# Allegro board belt-box-001-1003.brd
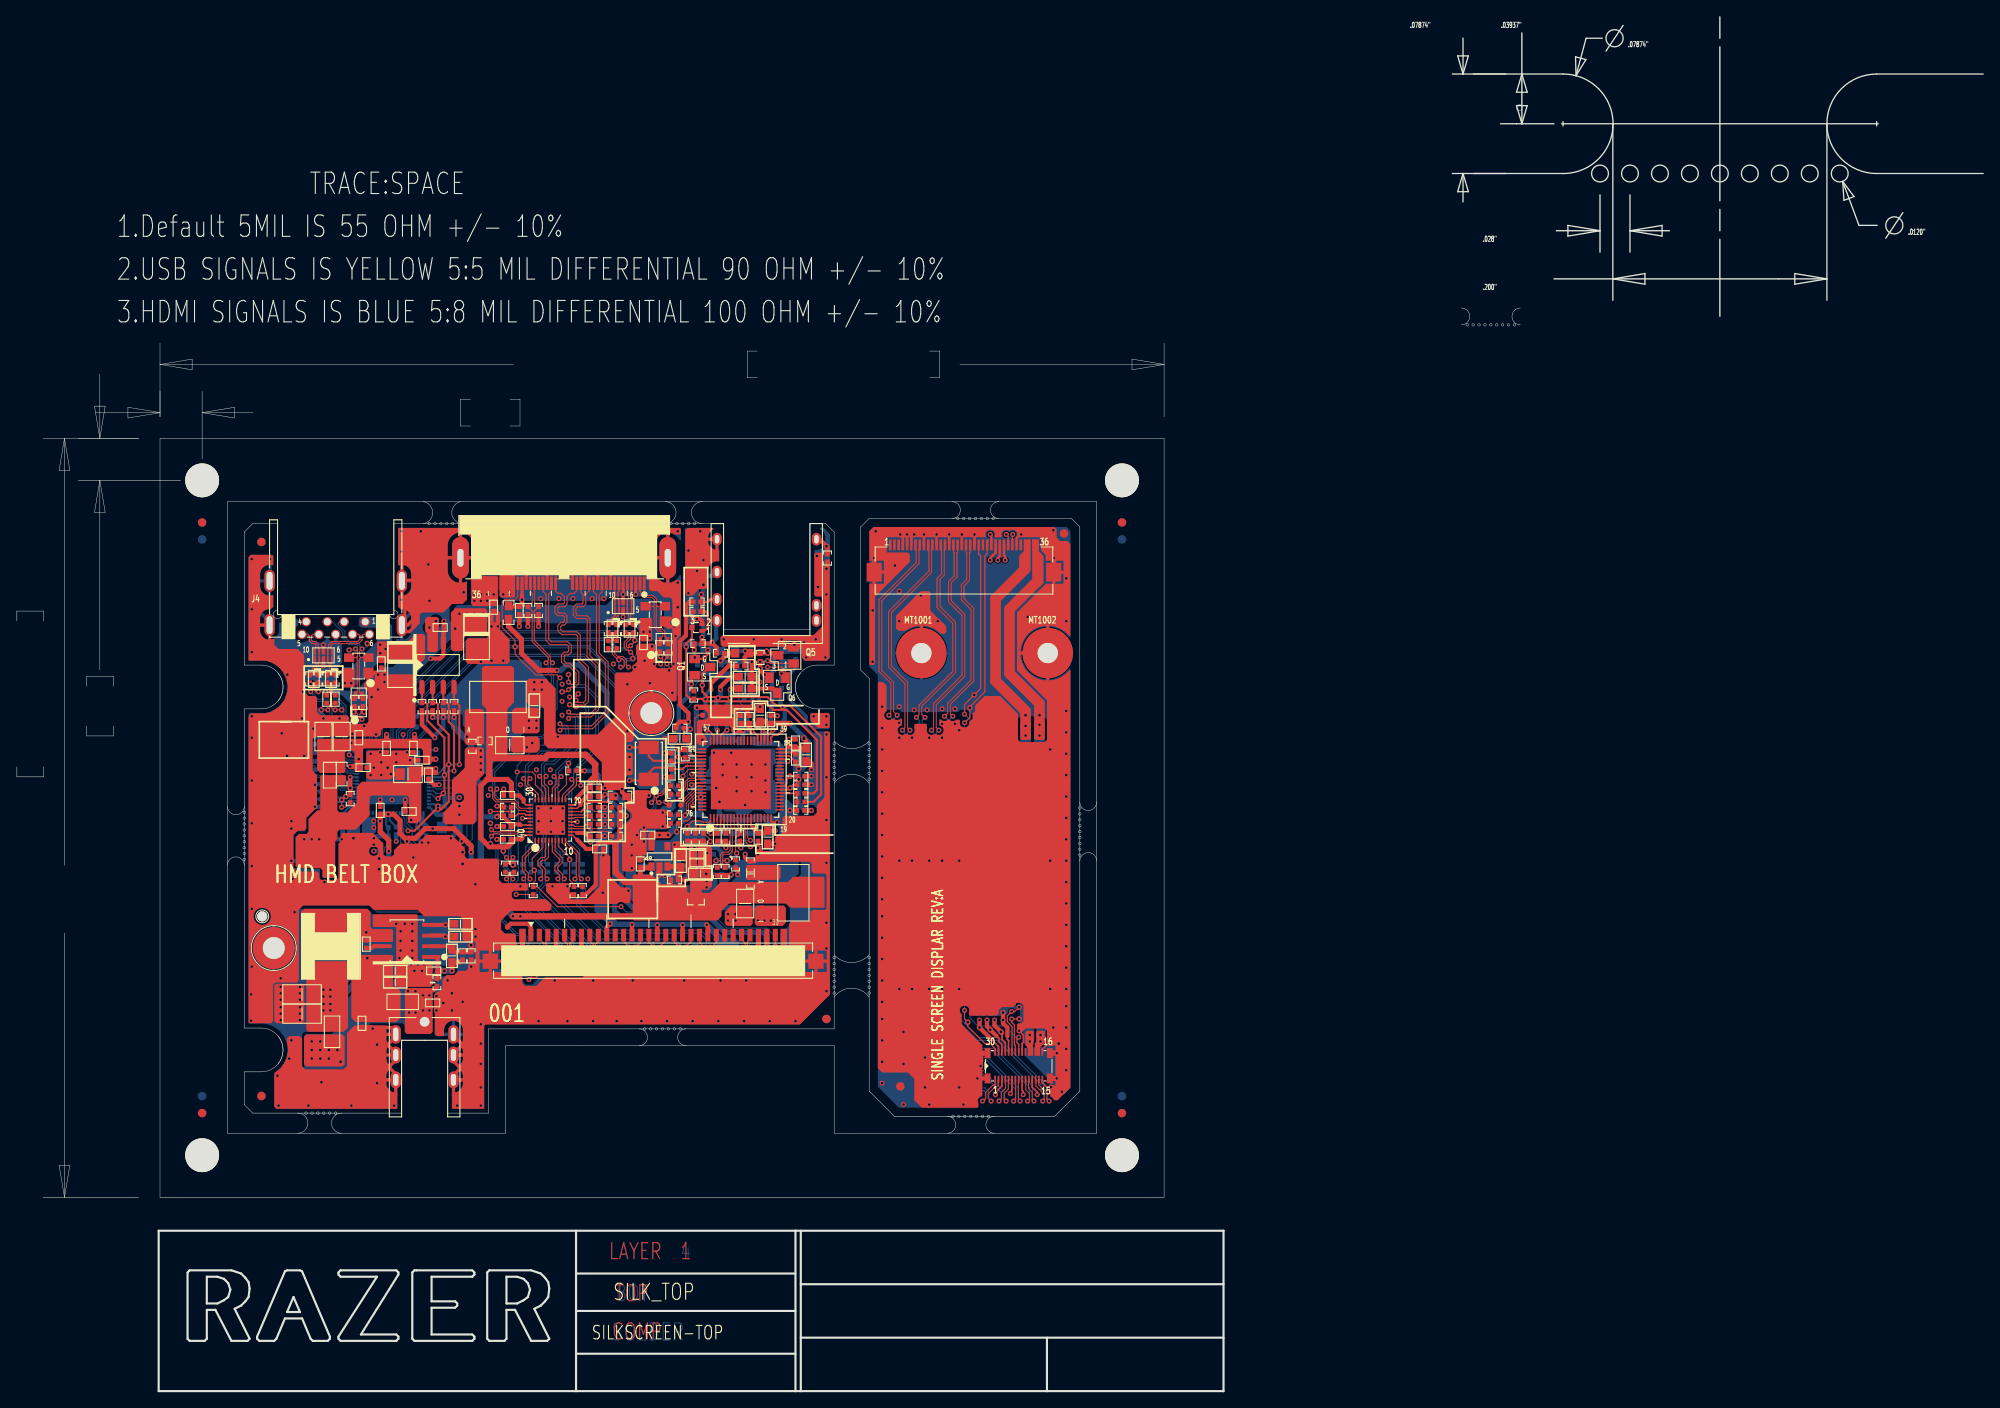
[diagram p0: board, top side]
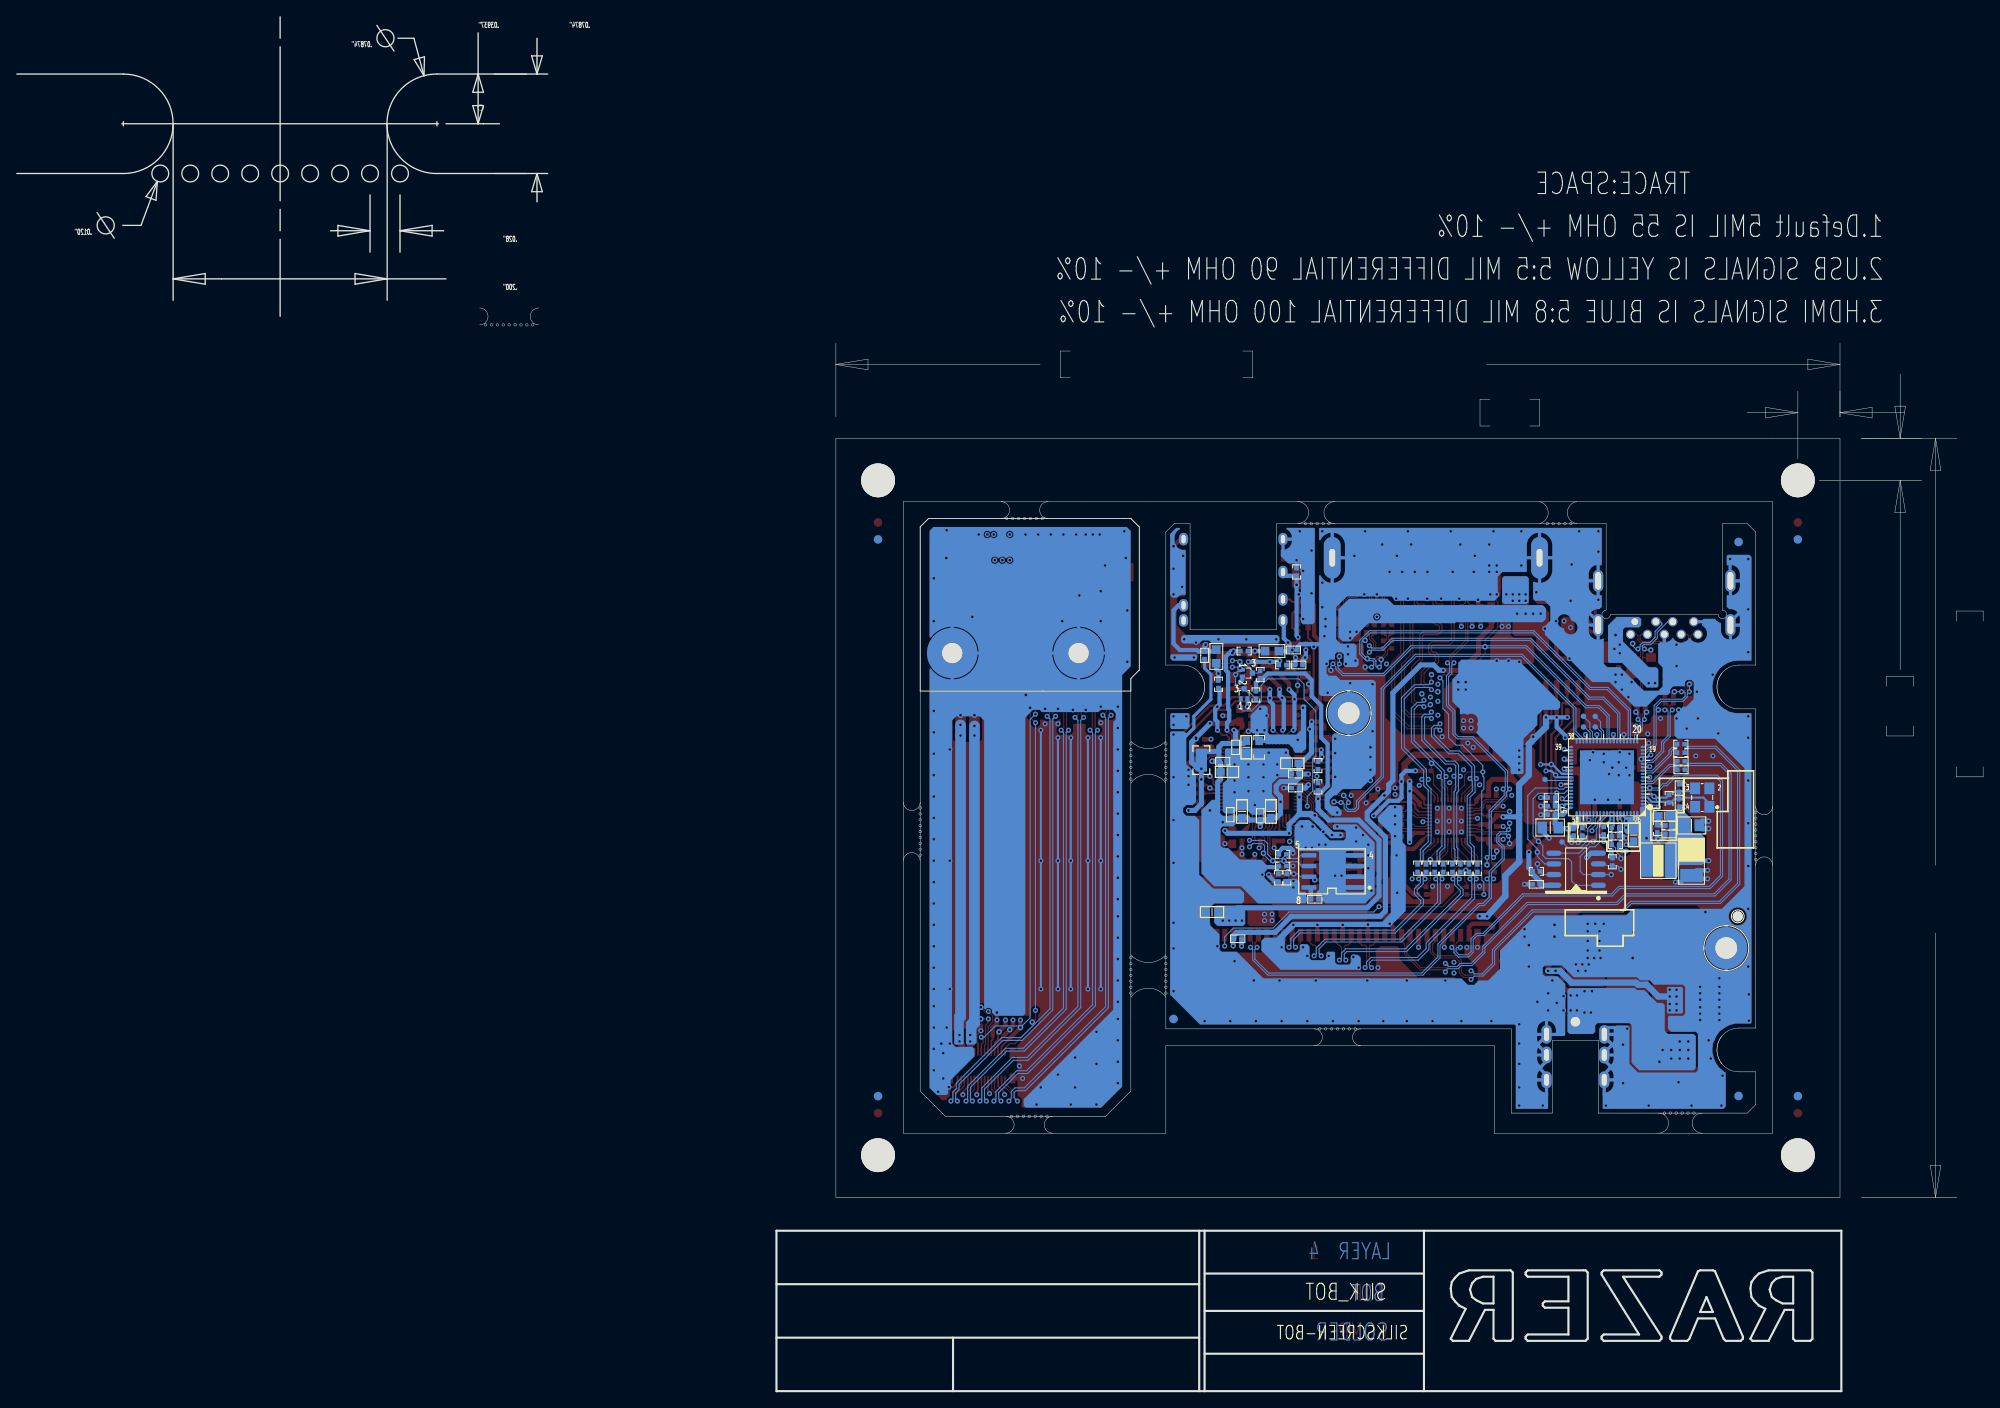
[diagram p1: board, bottom side, seen from below]

Outline 233.33 x 163.2 mm; copper layers: TOP, IN1, IN2, BOTTOM. Coordinates in mm from the lower left corner of the outline.

## Design rules (mm)
net group DIFFPAIR0: nets HMD_CON_DATA2+ HMD_CON_DATA2-
net group DIFFPAIR1: nets HMD_CON_DATA1+ HMD_CON_DATA1-
net group DIFFPAIR2: nets HMD_CON_DATA0+ HMD_CON_DATA0-
net group DIFFPAIR3: nets HMD_CON_CLK+ HMD_CON_CLK-
net group DIFFPAIR4: nets HDMI_CON_CLK+ HDMI_CON_CLK-
net group DIFFPAIR5: nets HDMI_CON_DATA0+ HDMI_CON_DATA0-
net group DIFFPAIR6: nets HDMI_CON_DATA1+ HDMI_CON_DATA1-
net group DIFFPAIR7: nets HDMI_CON_DATA2+ HDMI_CON_DATA2-
net group DIFFPAIR8: nets LCD1_DATAN3_T LCD1_DATAP3_T
net group DIFFPAIR9: nets LCD1_DATAN0_T LCD1_DATAP0_T
net group DIFFPAIR10: nets LCD1_CLKN_T LCD1_CLKP_T
net group DIFFPAIR11: nets LCD1_DATAN1_T LCD1_DATAP1_T
net group DIFFPAIR12: nets LCD1_DATAN2_T LCD1_DATAP2_T
net group DIFFPAIR13: nets HUB_RX1_CON_N HUB_RX1_CON_P
net group DIFFPAIR14: nets HUB_RXN1 HUB_RXP1
net group DIFFPAIR15: nets HUB_TX1_CON_N HUB_TX1_CON_P
net group DIFFPAIR16: nets USB3_TX1_C_N USB3_TX1_C_P
net group DIFFPAIR17: nets HUB_TXN1 HUB_TXP1
net group DIFFPAIR18: nets USB1+ USB1-
net group DIFFPAIR19: nets HUB_D+1 HUB_D-1
net group DIFFPAIR20: nets USB3.0_RXN_R USB3.0_RXP_R
net group DIFFPAIR21: nets USB3.0_TXN_R USB3.0_TXP_R
net group DIFFPAIR22: nets USB3.0_RXN USB3.0_RXP
net group DIFFPAIR23: nets USB3.0_TXN USB3.0_TXP
net group DIFFPAIR24: nets USB2.0_D+ USB2.0_D-
net group DIFFPAIR25: nets HUB_TX2_CON_N HUB_TX2_CON_P
net group DIFFPAIR26: nets USB3_TX2_C_N USB3_TX2_C_P
net group DIFFPAIR27: nets HUB_TXN2 HUB_TXP2
net group DIFFPAIR28: nets HUB_RX2_CON_N HUB_RX2_CON_P
net group DIFFPAIR29: nets HUB_RXN2 HUB_RXP2
net group DIFFPAIR30: nets USB2+ USB2-
net group DIFFPAIR31: nets HUB_D+2 HUB_D-2
net group DIFFPAIR32: nets USBP1N_R USBP1P_R
net group DIFFPAIR33: nets HUB_D+3 HUB_D-3

## Placement (name value [footprint] x y rotation side)
C1  0.1UF  [C0402]  58.23 65.53 0 top
C2  0.1U/16V_4  [C0402]  58.23 67.06 0 top
C3  0.1UF  [C0402]  58.23 70.74 0 top
C4  0.1UF  [C0402]  88.46 53.72 180 bottom
C5  0.1UF  [C0402]  59.63 92.71 270 top
C6  0.1UF  [C0402]  68.52 71.63 0 top
C7  0.1U/16V_4  [C0402]  69.15 64.39 0 top
C8  0.1UF  [C0402]  68.52 70.61 0 top
C9  0.1UF  [C0402]  68.52 65.91 0 top
C10  10uF_X5R_6.3V  [C0805]  86.42 57.91 90 top
C11  1uF_X5R_6.3V  [C0603]  91.5 56.9 180 bottom
C12  10uF_X5R_6.3V  [C0805]  58.48 76.71 180 top
C13  1uF_X5R_6.3V  [C0603]  61.4 81.41 270 top
C14  6TPE220MAZB  [TANB]  54.55 89.41 270 top
C15  470pF_X7R_50V  [C0402]  74.36 88.9 270 top
C16  0.1uF_X5R_10V  [C0402]  71.18 88.65 90 top
C17  0.1uF_X5R_10V  [C0402]  70.17 88.65 90 top
C18  0.1uF_X5R_10V  [C0402]  35.85 74.8 180 bottom
C19  0.1uF_X5R_10V  [C0402]  35.85 73.79 180 bottom
C20  0.1UF  [C0402]  46.55 68.83 180 top
C21  0.1UF  [C0402]  48.83 73.15 270 top
C22  0.1UF  [C0402]  48.07 74.93 180 top
C23  0.1UF  [C0402]  41.08 74.04 0 top
C24  0.1UF  [C0402]  47.05 76.33 270 top
C25  0.1UF  [C0402]  43.88 76.33 270 top
C26  0.1UF  [C0402]  40.58 77.6 90 top
C27  4.7UF  [C0603]  41.47 66.04 270 bottom
C28  10uF_X5R_6.3V  [C0805]  51.37 66.93 180 bottom
C29  0.1UF  [C0402]  43.12 68.96 90 top
C30  0.1UF  [C0402]  48.58 66.42 270 bottom
C31  0.1UF  [C0402]  51.24 68.45 0 bottom
C32  0.1UF  [C0402]  53.02 60.2 0 bottom
C33  22uF  [C0805]  34.62 67.18 0 bottom
C34  0.1UF  [C0402]  37.27 66.17 0 bottom
C35  22P_NPO_50V  [C0603]  37.77 68.33 0 bottom
C36  10uF_X5R_6.3V  [C0805]  46.42 73.28 0 top
C37  10uF_X5R_6.3V  [C0805]  38.54 77.72 270 top
C38  10uF_X5R_6.3V  [C0805]  36.39 77.72 270 top
C39  27P_NPO_50V  [C0402]  36.08 69.85 270 bottom
C40  1U/6.3V_4  [C0402]  43.62 65.91 180 bottom
C41  27P_NPO_50V  [C0402]  36.08 71.63 90 bottom
C42  1U/6.3V_4  [C0402]  50.23 90.68 0 top
C43  6TPE220MAZB  [TANB]  45.53 86.11 270 top
C44  470pF_X7R_50V  [C0402]  43.24 86.36 270 top
C45  0.1uF_X5R_10V  [C0402]  36.77 82.17 90 top
C46  0.1uF_X5R_10V  [C0402]  37.78 82.17 90 top
C47  15P/50V_4  [C0402]  77.66 75.31 90 top
C48  10U/6.3V_6  [C0603]  81.98 74.55 0 bottom
C49  0.1U/16V_4  [C0402]  81.6 73.28 0 bottom
C50  10U/6.3V_6  [C0603]  78.68 77.47 180 top
C51  18P/50V_4  [C0402]  77.66 73.41 270 top
C52  10U/6.3V_6  [C0603]  81.09 61.47 180 top
C53  1U/6.3V_4  [C0402]  80.71 63.75 180 top
C54  0.1U/16V/X7R_4  [C0402]  80.71 62.74 180 top
C55  10U/6.3V_6  [C0603]  84.52 68.83 90 bottom
C56  0.1U/16V_4  [C0402]  85.79 68.33 90 bottom
C57  10U/6.3V_6  [C0603]  89.09 65.79 270 top
C58  0.1U/16V_4  [C0402]  87.95 65.79 270 top
C59  0.1U/16V_4  [C0402]  81.6 71.63 0 bottom
C60  0.1U/16V_4  [C0402]  83.12 65.79 270 top
C61  1U/6.3V_4  [C0402]  85.92 79.76 270 top
C62  0.1U/16V_4  [C0402]  86.93 79.76 90 top
C63  10U/6.3V_6  [C0603]  88.2 80.26 90 top
C64  0.1U/16V_4  [C0402]  89.47 79.76 90 top
C65  0.1U/16V_4  [C0402]  89.34 68.45 90 bottom
C66  10U/6.3V_6  [C0603]  87.44 76.45 270 bottom
C67  0.1U/16V_4  [C0402]  88.71 76.45 270 bottom
C68  *10U/6.3V_6_NC  [C0603]  87.95 68.83 90 bottom
C69  1U/6.3V_4  [C0402]  73.98 62.61 270 top
C70  1U/6.3V_4  [C0402]  74.87 66.04 0 top
C71  10U/6.3V_6  [C0603]  93.66 75.56 270 top
C72  0.1U/16V_4  [C0402]  92.39 76.96 90 top
C73  1U/6.3V_4  [C0402]  92.39 75.18 90 top
C74  2.2U/6.3V_6  [C0603]  78.8 62.99 270 top
C75  10U/6.3V_6  [C0603]  89.73 73.53 180 bottom
C76  0.1U/16V_4  [C0402]  90.23 74.8 180 bottom
C77  2.2U/6.3V_6  [C0603]  86.42 83.44 180 top
C78  2.2U/6.3V_6  [C0603]  86.42 84.84 180 top
C79  0.1U/16V_4  [C0402]  79.31 58.42 180 bottom
C80  100pF_NPO_50V  [C0402]  81.85 88.01 180 bottom
C81  100pF_NPO_50V  [C0402]  92.39 87.38 270 bottom
C82  1uF/25V  [C0603]  52.64 53.98 0 top
C83  3300PF/25V  [C0603]  52.64 55.5 0 top
C84  10uf/25v  [C0603]  44.89 48.51 0 top
C85  0.1uf/16v  [C0402]  49.47 49.91 180 top
C86  0.1uF/25V  [C0402]  41.47 53.09 90 top
C87  22UF/10V  [C1206]  33.85 47.12 180 top
C88  2200pF/50V_X7R  [C0402]  40.96 43.69 270 top
C89  10uf/25v  [C0603]  44.89 49.91 0 top
C90  22UF/10V  [C1206]  33.85 44.83 180 top
C91  22PF/50V  [C0603]  51.63 51.69 90 top
C92  2200pF/50V_X7R  [C0402]  49.34 46.1 0 top
C93  0.1UF  [C0402]  56.58 93.09 270 top
C94  X_0.1U/16V_4  [C0402]  85.79 65.79 90 top
C95  1U/6.3V_4  [C0402]  81.22 86.23 0 bottom
EC1  100uF  [TANBB2]  34.61 62.74 270 bottom
FB1  BK1608HS601  [L0603]  86.04 87.63 180 top
FB2  BK1608HS601  [L0603]  91 87.25 90 bottom
FB3  BK1608HS601  [L0603]  84.39 87.88 180 bottom
H1  -  [HOLEC197D102]  75.29 80.52 0 top
H2  -  [HOLEC197D102]  30.49 52.62 0 top
H4  -  [HOLEC47D47N]  29.12 56.38 0 top
J1  IPEX_30PIN  [I-PEX_20389-030E]  75.5 51.05 0 top
J2  Hirose 36pin  [HRS_EDC3-124422]  64.94 101.84 180 top
J3  SINGATRON_2DC-5061-Q05F  [SINGATRON_2DC3064-010111F]  48.39 35.57 180 top
J4  CON SUNFUN_U3FA-RS01  [SINGATRON_2UB1585-000121F]  37.84 96.22 180 top
J6  2SJ2284-102592  [SINGATRON_2SJ2284-102592]  88.99 103.02 180 top
J1001  FH12-36S-0.5SH(55)  [FH12-36S-0_5SH]  112.39 97.45 0 top
J1002  -  [AXT530124]  118.89 38.64 90 top
L1  X_80_100MHz  [DLP11T]  72.71 90.55 270 top
L2  X_80_100MHz  [DLP11T]  70.68 90.55 270 top
L3  X_90_100MHz  [BW_WCM2012F2S-900T04]  76.77 88.27 90 top
L4  10uH  [TY-TOP_MDJE4040T100MM]  38.54 62.99 180 bottom
L5  X_80_100MHz  [DLP11T]  35.24 84.58 270 top
L6  X_80_100MHz  [DLP11T]  37.27 84.58 270 top
L7  X_90_100MHz  [BW_WCM2012F2S-900T04]  40.58 81.79 90 top
L8  *0_0805short_NC  [SHORT0805]  80.58 59.44 270 top
L9  *0_0805short_NC  [SHORT0805]  92.77 74.93 90 bottom
L10  3.3UH_SMPI0603HW  [SMPI0603HW]  37.27 52.83 270 top
L11  HCB2012K_800T80_0805  [L0805]  45.78 46.23 0 top
L12  X_HCB2012K_800T80_0805_NC  [L0805]  37.4 42.67 270 top
MT1001  MOUNTING HOLE  [HOLE_2_4MM]  107.34 87.65 0 top
MT1002  MOUNTING HOLE  [HOLE_2_4MM]  122.34 87.65 0 top
NOREF  -  []  16.99 23.02 90 top
NOREF#2  -  [unnamed#2]  96.08 44.2 0 top
NOREF#3  -  [unnamed#2]  124.27 101.85 0 top
NOREF#4  -  [unnamed#2]  104.84 36.2 0 top
NOREF#5  -  [unnamed#3]  21.99 28.02 0 top
NOREF#6  -  [unnamed#3]  21.99 108.16 180 top
NOREF#7  -  []  16.99 113.16 0 top
NOREF#8  -  []  16.83 0 0 top
NOREF#9  -  []  21.99 108.16 90 top
NOREF#10  -  [unnamed#3]  131.14 108.16 180 top
NOREF#11  -  [unnamed#2]  29.02 100.84 0 top
NOREF#12  -  []  16.99 113.16 0 top
NOREF#13  -  [unnamed#3]  131.14 28.02 0 top
NOREF#14  -  [unnamed#2]  29.02 35.05 0 top
NOREF#15  -  [unnamed#2]  29.02 35.05 180 bottom
NOREF#16  -  [unnamed#2]  96.08 44.2 180 bottom
NOREF#17  -  [unnamed#2]  29.02 100.84 180 bottom
Q1  BSS138  [SOT23-GDS]  81.34 85.98 270 top
Q2  2SK3541  [VMT3-132]  80.71 90.68 90 top
Q3  2SK3541  [VMT3-132]  87.69 82.8 180 bottom
Q4  2SK3541  [VMT3-132]  87.31 85.27 270 bottom
Q5  Si2312BDS  [SOT23-132]  91.25 87.38 90 top
Q6  BSS138  [SOT23-GDS]  90.23 83.82 180 top
R1  2.2K  [R0402]  61.91 92.71 90 top
R2  2.2K  [R0402]  60.64 92.71 90 top
R3  0  [R0603]  58.36 92.46 90 top
R4  4.99K  [R0603]  71.56 70.61 0 top
R5  4.99K  [R0402]  55.56 77.22 180 top
R6  619  [R0402]  87.06 60.58 90 top
R7  0  [R0402]  73.22 90.55 90 top
R8  1K  [R0402]  87.06 62.48 90 top
R9  1K  [R0402]  54.04 76.58 270 top
R10  0  [R0402]  72.2 90.55 90 top
R11  0  [R0402]  71.18 90.55 90 top
R12  X_4.7K  [R0402]  71.06 69.34 180 top
R13  X_4.7K  [R0402]  65.98 73.66 180 top
R14  4.7K  [R0402]  71.06 65.91 180 top
R15  X_4.7K  [R0402]  71.06 68.33 180 top
R16  X_4.7K  [R0402]  67.12 59.44 90 top
R17  X_4.7K  [R0402]  58.23 68.33 0 top
R18  4.7K  [R0402]  71.06 67.31 180 top
R19  0  [R0402]  70.17 90.55 90 top
R20  0  [R0402]  77.28 88.27 270 top
R21  X_4.7K  [R0402]  68.52 69.34 0 top
R22  X_4.7K  [R0402]  68.52 68.33 0 top
R23  X_4.7K  [R0402]  66.1 59.44 270 top
R24  X_4.7K  [R0402]  58.23 69.34 180 top
R25  X_4.7K  [R0402]  68.52 67.31 0 top
R26  0  [R0402]  76.26 88.27 270 top
R27  0  [R0402]  35.88 76.84 0 bottom
R28  0  [R0402]  35.88 75.82 0 bottom
R29  10K  [R0402]  53.02 61.72 0 bottom
R30  10K  [R0402]  44.01 62.87 270 bottom
R31  240K 1%  [R0402]  37.27 67.18 0 bottom
R32  0  [R0603]  38.54 73.28 90 top
R33  10K  [R0402]  45.02 66.55 90 bottom
R34  240K  [R0402]  38.67 66.8 270 bottom
R35  30K  [R0402]  43.62 64.9 0 bottom
R36  5.1K  [R0402]  51.24 70.49 180 bottom
R37  100K  [R0402]  47.56 66.42 270 bottom
R38  680  [R0402]  39.56 70.36 90 top
R39  1M  [R0402]  37.27 70.36 90 bottom
R40  39K  [R0402]  43.62 66.93 180 bottom
R41  10K  [R0402]  51.24 69.47 0 bottom
R42  100K  [R0402]  51.88 81.28 90 top
R43  10K  [R0402]  50.61 81.28 90 top
R44  10K  [R0402]  49.34 81.28 90 top
R45  100K  [R0402]  48.07 81.28 90 top
R46  0  [R0402]  34.73 84.58 90 top
R47  0  [R0402]  35.75 84.58 90 top
R48  0  [R0402]  36.77 84.58 90 top
R49  0  [R0402]  41.08 81.79 270 top
R50  0  [R0402]  37.78 84.58 90 top
R51  0  [R0402]  40.07 81.79 270 top
R52  22_4  [R0402]  78.04 71.88 0 top
R53  22_4  [R0402]  78.04 70.87 0 top
R54  100K_4  [R0402]  78.68 78.74 180 top
R55  100K_4  [R0402]  79.31 75.69 90 top
R56  10K_4  [R0402]  78.04 68.45 180 top
R57  100K_4  [R0402]  78.04 67.44 180 top
R58  10K_4  [R0402]  81.47 65.79 270 top
R59  10K_4  [R0402]  80.52 65.79 270 top
R60  10K_4  [R0402]  79.57 65.79 270 top
R61  80.6K/F_4  [R0402]  78.93 71.75 270 bottom
R62  130K/F_4  [R0402]  78.93 74.3 270 bottom
R63  10K_4  [R0402]  85.28 62.61 270 top
R64  4.7K_4  [R0402]  78.04 60.71 180 top
R65  10K_4  [R0402]  84.06 61.72 90 top
R66  10K_4  [R0402]  83.12 61.72 90 top
R67  10K_4  [R0402]  84.14 65.79 90 top
R68  *0_6_NC  [R0603]  85.92 76.45 90 bottom
R69  5.1K/F_4  [R0402]  93.03 68.96 180 top
R70  10K/F_4  [R0402]  93.03 69.98 0 top
R71  5.1K/F_4  [R0402]  93.03 70.99 0 top
R72  10K_4  [R0402]  93.03 72.01 180 top
R73  10K_4  [R0402]  93.03 73.03 180 top
R74  2.2K  [R0402]  85.92 86.11 180 top
R75  0  [R0402]  83.5 87.63 180 top
R76  X_0  [R0402]  80.84 88.77 180 top
R77  100  [R0402]  88.2 87.12 270 top
R78  X_0  [R0402]  81.47 97.28 270 bottom
R79  0  [R0402]  96.2 98.93 270 top
R80  *10K_4_NC  [R0402]  82.61 60.96 270 bottom
R82  33K  [R0402]  83.12 86.23 180 bottom
R84  0  [R0402]  80.33 82.68 90 top
R85  5.1_1%  [R0402]  90.74 83.95 90 bottom
R86  5.1_1%  [R0402]  87.69 87.88 180 bottom
R87  124K_1%  [R0402]  52.9 51.69 90 top
R88  21.5K_1%  [R0402]  53.91 51.69 270 top
R89  10K_1%  [R0402]  49.85 48.51 90 top
R90  X_0  [R0402]  60.01 62.1 270 bottom
R91  X_0  [R0402]  61.02 62.1 270 bottom
R92  X_0  [R0402]  62.04 62.1 270 bottom
R93  X_0  [R0402]  62.98 62.1 270 bottom
R94  X_0  [R0402]  64.07 62.1 270 bottom
R95  X_0  [R0402]  65.09 62.1 270 bottom
R96  X_0  [R0402]  66.1 62.1 270 bottom
R97  X_0  [R0402]  67.12 62.1 270 bottom
R98  X_0  [R0402]  61.28 59.44 90 top
R99  10K_4  [R0402]  83.63 60.96 90 bottom
R100  X_0  [R0402]  58.99 62.1 270 top
R101  X_0  [R0402]  57.98 62.1 270 top
R102  10K_4  [R0402]  80.71 93.73 180 top
R103  X_0  [R0402]  80.71 92.58 0 top
R104  47K_4  [R0402]  86.3 82.68 90 bottom
R105  47K_4  [R0402]  85.79 85.09 270 bottom
R282  4.7K  [R0402]  83.12 63.75 0 bottom
R283  4.7K  [R0402]  83.12 62.36 0 bottom
TP1  PAD  [TPC26T]  77.41 69.6 0 top
TP2  PAD  [TPC26T]  78.8 69.6 0 top
TP3  TESTPAD_C26  [TPC26T]  81.34 80.26 0 top
TP4  TESTPAD_C26  [TPC26T]  58.23 55.12 0 top
TP5  TESTPAD_C26  [TPC26T]  49.97 65.21 180 bottom
TP6  TESTPAD_C26  [TPC26T]  52.01 72.64 180 bottom
TP7  TESTPAD_C26  [TPC26T]  46.04 80.14 180 bottom
TP8  TESTPAD_C26  [TPC26T]  46.04 78.87 180 bottom
TP9  TESTPAD_C26  [TPC26T]  47.43 80.14 180 bottom
TP10  TESTPAD_C26  [TPC26T]  47.43 78.87 180 bottom
U1  PS8407ATQFN40GTR2-A1  [TQFN40P500X500-41N]  63.31 67.82 90 top
U2  G1117  [SOT223-123]  91.88 59.18 270 top
U3  G1117  [SOT223-123]  57.09 82.17 0 top
U4  LXES2TBBB4  [LXES2TBBB4-028]  71.95 93.22 90 top
U5  PRTR5V0U2X  [SOT143B]  75.76 92.2 90 top
U6  A25L512  [SOP8]  48.3 61.98 90 bottom
U7  LGA76  [QFN76-0_4MM]  44.64 72.9 90 bottom
U8  AIC1519N-0  [SOP8]  49.97 86.23 0 top
U9  PRTR5V0U2X  [SOT143B]  40.58 86.11 90 top
U10  LXES2TBBB4  [LXES2TBBB4-028]  36.39 87.38 90 top
U11  CX20705-21Z  [QFN76-9X9-4-77P]  85.92 72.64 90 top
U12  G9090-180T11U  [SOT23-5]  76.26 63.5 0 top
U13  BR24T256FJ-WGE2  [SOIC8-6-1_27]  77.28 61.72 90 bottom
U14  TPS54327DDA  [R-PDSO-G8]  46.29 53.47 90 top
X_FB1  120ohm@100MHz  [L0603]  37.15 73.15 90 top
Y1  25MHz 20PF 3.2x2.5 +/-30PPM  [SK-3M]  33.34 70.49 90 bottom
Y2  48M-30ppm-7A48000047  [XTL-5X3_2-3_8-2P]  74.99 74.55 90 top

## Library data of the parts
C1-C9 C15-C26 C29-C32 C34 C39-C42 C44-C47 C49 C51 C53 C54 C56 C58-C62 C64 C65 C67 C69 C70 C72 C73 C76 C79-C81 C85 C86 C88 C92-C95 = C0402
C10 C12 C28 C33 C36-C38 = C0805
C11 C13 C27 C35 C48 C50 C52 C55 C57 C63 C66 C68 C71 C74 C75 C77 C78 C82-C84 C89 C91 = C0603
C14 C43 = TANB
C87 C90 = C1206
EC1 = TANBB2
FB1-FB3 X_FB1 = L0603
H1 H2 = HOLEC197D102
H4 = HOLEC47D47N
J1 = I-PEX_20389-030E
J2 = HRS_EDC3-124422
J3 = SINGATRON_2DC3064-010111F
J4 = SINGATRON_2UB1585-000121F
J6 = SINGATRON_2SJ2284-102592
J1001 = FH12-36S-0_5SH
J1002 = AXT530124
L1 L2 L5 L6 = DLP11T
L3 L7 = BW_WCM2012F2S-900T04
L4 = TY-TOP_MDJE4040T100MM
L8 L9 = SHORT0805
L10 = SMPI0603HW
L11 L12 = L0805
MT1001 MT1002 = HOLE_2_4MM
Q1 Q6 = SOT23-GDS
Q2-Q4 = VMT3-132
Q5 = SOT23-132
R1 R2 R5-R31 R33-R67 R69-R80 R82 R84-R105 R282 R283 = R0402
R3 R4 R32 R68 = R0603
TP1-TP10 = TPC26T
U1 = TQFN40P500X500-41N
U2 U3 = SOT223-123
U4 U10 = LXES2TBBB4-028
U5 U9 = SOT143B
U6 U8 = SOP8
U7 = QFN76-0_4MM
U11 = QFN76-9X9-4-77P
U12 = SOT23-5
U13 = SOIC8-6-1_27
U14 = R-PDSO-G8
Y1 = SK-3M
Y2 = XTL-5X3_2-3_8-2P

## Footprints (pads in the part's own frame, mm; a bottom-side part is the same pattern mirrored in y, then rotated)
AXT530124
  rect 0.914x0.203 smd: 1(-1.64,2.8) 2(-1.64,2.4) 3(-1.64,2) 4(-1.64,1.6) 5(-1.64,1.2) 6(-1.64,0.8) 7(-1.64,0.4) 8(-1.64,0) 9(-1.64,-0.4) 10(-1.64,-0.8) 11(-1.64,-1.2) 12(-1.64,-1.6) 13(-1.64,-2) 14(-1.64,-2.4) 15(-1.64,-2.8) 16(1.64,-2.8) 17(1.64,-2.4) 18(1.64,-2) 19(1.64,-1.6) 20(1.64,-1.2) 21(1.64,-0.8) 22(1.64,-0.4) 23(1.64,0) 24(1.64,0.4) 25(1.64,0.8) 26(1.64,1.2) 27(1.64,1.6) 28(1.64,2) 29(1.64,2.4) 30(1.64,2.8)
  rect 1.194x0.711 smd: M1(-1.506,3.7) M2(1.494,3.7) M3(-1.506,-3.7) M4(1.494,-3.7)
BW_WCM2012F2S-900T04
  rect 0.889x0.406 smd: 1(-0.85,0.4) 2(0.85,0.4) 3(-0.85,-0.4) 4(0.85,-0.4)
C0402
  rect 0.559x0.559 smd: 1(-0.457,0) 2(0.457,0)
C0603
  rect 1.016x0.889 smd: 1(-0.775,0) 2(0.775,0)
C0805
  rect 1.143x1.397 smd: 1(-0.953,0) 2(0.953,0)
C1206
  rect 1.27x1.651 smd: 1(-1.397,0) 2(1.397,0)
DLP11T
  rect 0.508x0.305 smd: 1(-0.625,0.275) 2(0.625,0.275) 3(0.625,-0.275) 4(-0.625,-0.275)
FH12-36S-0_5SH
  rect 0.305x1.295 smd: 1(-8.748,3.048) 2(-8.248,3.048) 3(-7.748,3.048) 4(-7.248,3.048) 5(-6.748,3.048) 6(-6.248,3.048) 7(-5.749,3.048) 8(-5.249,3.048) 9(-4.749,3.048) 10(-4.249,3.048) 11(-3.749,3.048) 12(-3.249,3.048) 13(-2.749,3.048) 14(-2.249,3.048) 15(-1.75,3.048) 16(-1.25,3.048) 17(-0.75,3.048) 18(-0.25,3.048) 19(0.25,3.048) 20(0.75,3.048) 21(1.25,3.048) 22(1.75,3.048) 23(2.249,3.048) 24(2.749,3.048) 25(3.249,3.048) 26(3.749,3.048) 27(4.249,3.048) 28(4.749,3.048) 29(5.249,3.048) 30(5.749,3.048) 31(6.248,3.048) 32(6.748,3.048) 33(7.248,3.048) 34(7.748,3.048) 35(8.248,3.048) 36(8.748,3.048)
  rect 1.803x2.21 smd: M1(-10.65,-0.198) M2(10.65,-0.198)
HOLE_2_4MM
  round 5.994 hole 2.4: 1(0,0)
HOLEC47D47N
  round 1.194 hole 1.194 unplated: (0,0)
HOLEC197D102
  round 5.004 hole 2.591: 1(0,0)
HRS_EDC3-124422
  rect 0.356x1.6 smd: 1(-9.5,5.9) 2(-9,5.9) 3(-8.5,5.9) 4(-8,5.9) 5(-7.5,5.9) 6(-7,5.9) 7(-6.5,5.9) 8(-6,5.9) 9(-5.5,5.9) 10(-5,5.9) 11(-4.5,5.9) 12(-4,5.9) 13(-3.5,5.9) 14(-3,5.9) 15(-2.5,5.9) 16(-2,5.9) 17(-1.5,5.9) 18(-1,5.9) 19(1,5.9) 20(1.5,5.9) 21(2,5.9) 22(2.5,5.9) 23(3,5.9) 24(3.5,5.9) 25(4,5.9) 26(4.5,5.9) 27(5,5.9) 28(5.5,5.9) 29(6,5.9) 30(6.5,5.9) 31(7,5.9) 32(7.5,5.9) 33(8,5.9) 34(8.5,5.9) 35(9,5.9) 36(9.5,5.9)
  oval 2.007x4.953 hole 0.711x2.108: G1(-12.3,2.875) G2(12.3,2.875)
  rect 2.438x1.803 smd: S1(-4.625,1.3) S2(4.625,1.3)
I-PEX_20389-030E
  rect 0.61x1.499 smd: 1(-14.5,3.1) 2(-13.5,3.1) 3(-12.5,3.1) 4(-11.5,3.1) 5(-10.5,3.1) 6(-9.5,3.1) 7(-8.5,3.1) 8(-7.5,3.1) 9(-6.5,3.1) 10(-5.5,3.1) 11(-4.5,3.1) 12(-3.5,3.1) 13(-2.5,3.1) 14(-1.5,3.1) 15(-0.5,3.1) 16(0.5,3.1) 17(1.5,3.1) 18(2.5,3.1) 19(3.5,3.1) 20(4.5,3.1) 21(5.5,3.1) 22(6.5,3.1) 23(7.5,3.1) 24(8.5,3.1) 25(9.5,3.1) 26(10.5,3.1) 27(11.5,3.1) 28(12.5,3.1) 29(13.5,3.1) 30(14.5,3.1)
  rect 1.803x1.803 smd: G1(-19.325,0) G2(19.325,0)
  rect 0.787x1.499 smd: S1(-15.5,3.1) S2(15.5,3.1)
L0603
  rect 1.016x1.016 smd: 1(-0.813,0) 2(0.813,0)
L0805
  rect 1.346x1.448 smd: 1(-1.003,0) 2(1.003,0)
LXES2TBBB4-028
  rect 0.686x0.203 smd: 1(-0.437,1) 2(-0.437,0.5) 4(-0.437,-0.5) 5(-0.437,-1) 6(0.437,-1) 7(0.437,-0.5) 9(0.437,0.5) 10(0.437,1)
  rect 0.686x0.406 smd: 3(-0.437,0) 8(0.437,0)
QFN76-0_4MM
  oval 0.254x0.508 smd: 1(-3.6,-4.25) 2(-3.2,-4.25) 3(-2.8,-4.25) 4(-2.4,-4.25) 5(-2,-4.25) 6(-1.6,-4.25) 7(-1.2,-4.25) 8(-0.8,-4.25) 9(-0.4,-4.25) 10(0,-4.25) 11(0.4,-4.25) 12(0.8,-4.25) 13(1.2,-4.25) 14(1.6,-4.25) 15(2,-4.25) 16(2.4,-4.25) 17(2.8,-4.25) 18(3.2,-4.25) 19(3.6,-4.25) 39(3.6,4.25) 40(3.2,4.25) 41(2.8,4.25) 42(2.4,4.25) 43(2,4.25) 44(1.6,4.25) 45(1.2,4.25) 46(0.8,4.25) 47(0.4,4.25) 48(0,4.25) 49(-0.4,4.25) 50(-0.8,4.25) 51(-1.2,4.25) 52(-1.6,4.25) 53(-2,4.25) 54(-2.4,4.25) 55(-2.8,4.25) 56(-3.2,4.25) 57(-3.6,4.25)
  oval 0.508x0.254 smd: 20(4.25,-3.6) 21(4.25,-3.2) 22(4.25,-2.8) 23(4.25,-2.4) 24(4.25,-2) 25(4.25,-1.6) 26(4.25,-1.2) 27(4.25,-0.8) 28(4.25,-0.4) 29(4.25,0) 30(4.25,0.4) 31(4.25,0.8) 32(4.25,1.2) 33(4.25,1.6) 34(4.25,2) 35(4.25,2.4) 36(4.25,2.8) 37(4.25,3.2) 38(4.25,3.6) 58(-4.25,3.6) 59(-4.25,3.2) 60(-4.25,2.8) 61(-4.25,2.4) 62(-4.25,2) 63(-4.25,1.6) 64(-4.25,1.2) 65(-4.25,0.8) 66(-4.25,0.4) 67(-4.25,0) 68(-4.25,-0.4) 69(-4.25,-0.8) 70(-4.25,-1.2) 71(-4.25,-1.6) 72(-4.25,-2) 73(-4.25,-2.4) 74(-4.25,-2.8) 75(-4.25,-3.2) 76(-4.25,-3.6)
  rect 6.401x6.401 smd: 77(0,0)
QFN76-9X9-4-77P
  rect 0.991x0.203 smd: 1(-4.6,3.6) 2(-4.6,3.2) 3(-4.6,2.8) 4(-4.6,2.4) 5(-4.6,2) 6(-4.6,1.6) 7(-4.6,1.2) 8(-4.6,0.8) 9(-4.6,0.4) 10(-4.6,0) 11(-4.6,-0.4) 12(-4.6,-0.8) 13(-4.6,-1.2) 14(-4.6,-1.6) 15(-4.6,-2) 16(-4.6,-2.4) 17(-4.6,-2.8) 18(-4.6,-3.2) 19(-4.6,-3.6) 39(4.6,-3.6) 40(4.6,-3.2) 41(4.6,-2.8) 42(4.6,-2.4) 43(4.6,-2) 44(4.6,-1.6) 45(4.6,-1.2) 46(4.6,-0.8) 47(4.6,-0.4) 48(4.6,0) 49(4.6,0.4) 50(4.6,0.8) 51(4.6,1.2) 52(4.6,1.6) 53(4.6,2) 54(4.6,2.4) 55(4.6,2.8) 56(4.6,3.2) 57(4.6,3.6)
  rect 0.203x0.991 smd: 20(-3.6,-4.6) 21(-3.2,-4.6) 22(-2.8,-4.6) 23(-2.4,-4.6) 24(-2,-4.6) 25(-1.6,-4.6) 26(-1.2,-4.6) 27(-0.8,-4.6) 28(-0.4,-4.6) 29(0,-4.6) 30(0.4,-4.6) 31(0.8,-4.6) 32(1.2,-4.6) 33(1.6,-4.6) 34(2,-4.6) 35(2.4,-4.6) 36(2.8,-4.6) 37(3.2,-4.6) 38(3.6,-4.6) 58(3.6,4.6) 59(3.2,4.6) 60(2.8,4.6) 61(2.4,4.6) 62(2,4.6) 63(1.6,4.6) 64(1.2,4.6) 65(0.8,4.6) 66(0.4,4.6) 67(0,4.6) 68(-0.4,4.6) 69(-0.8,4.6) 70(-1.2,4.6) 71(-1.6,4.6) 72(-2,4.6) 73(-2.4,4.6) 74(-2.8,4.6) 75(-3.2,4.6) 76(-3.6,4.6)
  rect 7.112x7.112 smd: 77(0,0)
R0402
  rect 0.559x0.559 smd: 1(-0.457,0) 2(0.457,0)
R0603
  rect 1.016x0.889 smd: 1(-0.775,0) 2(0.775,0)
R-PDSO-G8
  rect 0.457x2.159 smd: 1(-1.905,-2.875) 2(-0.635,-2.875) 3(0.635,-2.875) 4(1.905,-2.875) 5(1.905,2.875) 6(0.635,2.875) 7(-0.635,2.875) 8(-1.905,2.875)
  rect 3.099x2.413 smd: 9(0,0)
SHORT0805
  rect 1.422x1.346 smd: 1(0.895,0) 2(-0.895,0)
SINGATRON_2DC3064-010111F
  rect 1.524x1.524 hole 1.143: 1(0,-8.3)
  oval 1.219x2.21 hole 0.61x1.6: 2(3.425,-6.8) G1(-3.425,-6.8)
  oval 1.219x2.007 hole 0.61x1.397: 3(3.425,-4.35) 4(-3.425,-4.35) G2(-3.425,-1.4) G3(3.425,-1.4)
SINGATRON_2SJ2284-102592
  oval 1.092x1.499 hole 0.508x0.991: 1(-5.9,9.7) 2(5.9,11.5) 3(-5.9,1.85) 4(5.9,5.75) 5(-5.9,11.5) 6(5.9,1.85) 7(5.9,9)
SINGATRON_2UB1585-000121F
  round 1.118 hole 0.813: 1(-3.5,4.85) 2(-1,4.85) 3(1,4.85) 4(3.5,4.85) 5(4,6.35) 6(2,6.35) 7(0,6.35) 8(-2,6.35) 9(-4,6.35)
  oval 1.219x2.616 hole 0.711x2.108: G1(-7.85,5.25) G2(7.85,5.25) G3(-7.85,0) G4(7.85,0)
SK-3M
  rect 1.397x1.194 smd: 1(-1.1,-0.85) 2(1.1,-0.85) 3(1.1,0.85) 4(-1.1,0.85)
SMPI0603HW
  rect 2.489x3.505 smd: 1(-3.1,0) 2(3.1,0)
SOIC8-6-1_27
  rect 0.533x1.753 smd: 1(-1.905,-2.73) 2(-0.635,-2.73) 3(0.635,-2.73) 4(1.905,-2.73) 5(1.905,2.73) 6(0.635,2.73) 7(-0.635,2.73) 8(-1.905,2.73)
SOP8
  oval 0.635x1.778 smd: 1(-1.905,-2.642) 2(-0.635,-2.642) 3(0.635,-2.642) 4(1.905,-2.642) 5(1.905,2.642) 6(0.635,2.642) 7(-0.635,2.642) 8(-1.905,2.642)
SOT23-5
  rect 0.711x1.016 smd: 1(-0.95,-1.2) 2(0,-1.2) 3(0.95,-1.2) 4(0.95,1.2) 5(-0.95,1.2)
SOT23-132
  rect 1.016x1.27 smd: 1(-0.965,-0.914) 2(0.965,-0.914) 3(0,0.914)
SOT23-GDS
  rect 1.016x1.27 smd: D(0,0.914) G(-0.965,-0.914) S(0.965,-0.914)
SOT143B
  rect 1.219x1.219 smd: 1(-0.8,-1.143)
  rect 1.016x1.219 smd: 2(1.003,-1.143) 3(1.003,1.143) 4(-1.003,1.143)
SOT223-123
  rect 0.991x2.311 smd: 1(-2.3,-2.75) 3(2.3,-2.75)
  custom 3.302x7.874 smd: 2(0,0)
TANB
  rect 1.27x2.54 smd: 1(-1.651,0) 2(1.651,0)
TANBB2
  rect 1.6x2.692 smd: 1(-1.5,0) 2(1.5,0)
TPC26T
  round 0.66 smd: 1(0,0)
TQFN40P500X500-41N
  rect 0.6x0.2 smd: 1(-2.4,1.8) 2(-2.4,1.4) 3(-2.4,1) 4(-2.4,0.6) 5(-2.4,0.2) 6(-2.4,-0.2) 7(-2.4,-0.6) 8(-2.4,-1) 9(-2.4,-1.4) 10(-2.4,-1.8) 21(2.4,-1.8) 22(2.4,-1.4) 23(2.4,-1) 24(2.4,-0.6) 25(2.4,-0.2) 26(2.4,0.2) 27(2.4,0.6) 28(2.4,1) 29(2.4,1.4) 30(2.4,1.8)
  rect 0.2x0.6 smd: 11(-1.8,-2.4) 12(-1.4,-2.4) 13(-1,-2.4) 14(-0.6,-2.4) 15(-0.2,-2.4) 16(0.2,-2.4) 17(0.6,-2.4) 18(1,-2.4) 19(1.4,-2.4) 20(1.8,-2.4) 31(1.8,2.4) 32(1.4,2.4) 33(1,2.4) 34(0.6,2.4) 35(0.2,2.4) 36(-0.2,2.4) 37(-0.6,2.4) 38(-1,2.4) 39(-1.4,2.4) 40(-1.8,2.4)
  rect 3.5x3.5 smd: E1(0,0)
TY-TOP_MDJE4040T100MM
  rect 1.194x3.708 smd: 1(-1.4,0) 2(1.4,0)
unnamed#2
  round 1.016 smd: 1(0,0)
unnamed#3
  round 4.013 hole 4.013 unplated: (0,0)
  round 1.016 smd: 2(0,5)
VMT3-132
  rect 0.457x0.635 smd: 1(-0.4,-0.599) 2(0.4,-0.599)
  rect 0.635x0.635 smd: 3(-0.001,0.599)
XTL-5X3_2-3_8-2P
  rect 1.6x2.388 smd: 1(-1.9,0) 2(1.9,0)

## Nets
+3.3V_VDDO: C48.1 C49.1 C52.1 C53.1 C54.1 C55.1 C56.1 C65.1 C66.1 C67.1 C68.1 C75.1 C76.1 C79.1 L8.2 L9.1 R54.2 R58.2 R59.2 R60.2 R63.2 R80.2 R102.2 R282.2 R283.2 U11.9 U11.19 U11.35 U11.41 U11.65 U13.8
+5V: C11.2 C13.2 C27.1 C42.1 C87.1 C90.1 C91.1 C93.1 J2.33 J2.34 J2.35 J2.36 L10.2 L12.1 R1.1 R2.1 R33.1 R35.1 R36.1 R61.2 R87.1 R104.2 R105.2 U2.3 U3.3 U7.72 U7.76 U8.7
+AVDDH33: C63.1 C64.1 L9.2 R69.1 U11.42
+V1.5: C1.2 C3.2 C6.1 C8.1 C9.1 C12.2 R5.1 U1.12 U1.19 U1.20 U1.31 U1.40 U3.2
+V3.3: C2.2 C7.1 C10.2 C69.2 L8.1 R6.1 R12.1 R13.1 R14.1 R15.1 R16.1 R17.1 R18.1 R42.1 R43.1 R44.1 R45.1 R64.2 U1.11 U1.37 U2.2 U12.1
+V5_USB: J1.1 TP4.1
AGND: C61.1 C62.2 C63.2 C64.2 C95.1 J6.6 Q2.2 Q3.2 Q4.2 Q5.2 R68.2 R76.2 R78.1 R79.2
AV12: C22.1 C23.1 C24.1 C25.1 C26.1 C37.2 C38.2 R32.2 U7.13 U7.19 U7.27 U7.35 U7.43 X_FB1.2
DGND: J1001.4 J1001.5 J1001.6 J1001.9 J1001.12 J1001.15 J1001.18 J1001.21 J1001.31 J1001.M1 J1001.M2 J1002.3 J1002.6 J1002.9 J1002.12 J1002.15 J1002.16 J1002.22 J1002.M1 J1002.M2 J1002.M3 J1002.M4 MT1001.1 MT1002.1
DV12: C20.1 C21.1 C33.2 C34.1 C35.1 C36.2 EC1.1 L4.2 R31.1 R32.1 U7.46 U7.61 X_FB1.1
GND: C1.1 C2.1 C3.1 C4.2 C5.2 C6.2 C7.2 C8.2 C9.2 C10.1 C11.1 C12.1 C13.1 C14.2 C15.2 C20.2 C21.2 C22.2 C23.2 C24.2 C25.2 C26.2 C27.2 C28.1 C29.2 C30.2 C31.2 C32.2 C33.1 C34.2 C36.1 C37.1 C38.1 C39.2 C40.2 C41.2 C42.2 C43.2 C44.2 C47.2 C48.2 C49.2 C50.2 C51.2 C52.2 C53.2 C54.2 C55.2 C56.2 C57.2 C58.2 C59.2 C60.2 C65.2 C66.2 C67.2 C68.2 C69.1 C70.1 C71.2 C72.2 C74.1 C75.2 C76.2 C79.2 C80.2 C81.2 C82.2 C83.2 C84.2 C85.2 C87.2 C88.2 C89.2 C90.2 C92.2 C93.2 C94.1 EC1.2 H1.1 H2.1 J1.4 J1.7 J1.10 J1.13 J1.16 J1.19 J1.22 J1.28 J1.G1 J1.G2 J1.S1 J1.S2 J2.3 J2.6 J2.9 J2.12 J2.15 J2.18 J2.21 J2.26 J2.29 J2.30 J2.31 J2.32 J2.G1 J2.G2 J2.S1 J2.S2 J3.2 J3.3 J3.4 J3.G1 J3.G2 J3.G3 J4.4 J4.7 J4.G1 J4.G2 J4.G3 J4.G4 R4.2 R8.2 R9.2 R21.2 R22.2 R23.2 R24.2 R25.2 R34.2 R37.2 R38.2 R40.2 R41.2 R55.2 R56.2 R57.2 R62.1 R65.1 R66.1 R67.1 R68.1 R72.1 R73.1 R88.2 R99.1 U1.15 U1.35 U1.E1 U4.3 U4.8 U5.1 U6.4 U7.10 U7.16 U7.24 U7.32 U7.40 U7.77 U8.6 U9.1 U10.3 U10.8 U11.77 U12.2 U13.1 U13.2 U13.3 U13.4 U14.5 U14.9
V33: C28.2 C29.1 C30.1 C31.1 C32.1 R29.2 R30.1 U6.8 U7.57 U7.58 U7.59 U7.71
VBUS-IN: R36.2 R41.1 U7.56
VIN: C92.1 J3.1 L11.2 L12.2 R89.1
+1.8_VDD: C57.1 C58.1 C59.1 C60.1 C70.2 U11.4 U11.13 U11.68 U12.5
APP: Q3.3 Q4.1 Q6.G R104.1
APP#: Q4.3 Q5.1 R105.1
CFG: R13.2 U1.23
DCIN_EN: R14.2 U1.13
DDCBUF: R18.2 R25.1 U1.14
EQ: R12.2 R21.1 U1.17
FB: C35.2 R31.2 R34.1 U7.2
GPIO2: Q3.1 U11.73
HDMI_5V: C4.1 J1.29 R3.1
HDMI_CON_CLK+: J1.21 R96.2 U1.9
HDMI_CON_CLK-: J1.23 R97.2 U1.10
HDMI_CON_DATA0+: J1.18 R94.2 U1.6
HDMI_CON_DATA0-: J1.20 R95.2 U1.7
HDMI_CON_DATA1+: J1.15 R92.2 U1.4
HDMI_CON_DATA1-: J1.17 R93.2 U1.5
HDMI_CON_DATA2+: J1.12 R90.2 U1.1
HDMI_CON_DATA2-: J1.14 R91.2 U1.2
HDMI_CON_DET: J1.30 R98.2 U1.3
HDMI_CON_SCL: J1.26 R100.2 U1.38
HDMI_CON_SDA: J1.27 R101.2 U1.39
HMD_5V: C5.1 J2.27 R3.2
HMD_CON_CLK+: J2.20 R96.1 U1.22
HMD_CON_CLK-: J2.22 R97.1 U1.21
HMD_CON_DATA0+: J2.17 R94.1 U1.25
HMD_CON_DATA0-: J2.19 R95.1 U1.24
HMD_CON_DATA1+: J2.14 R92.1 U1.27
HMD_CON_DATA1-: J2.16 R93.1 U1.26
HMD_CON_DATA2+: J2.11 R90.1 U1.30
HMD_CON_DATA2-: J2.13 R91.1 U1.29
HMD_CON_DET: J2.28 R98.1 U1.28
HMD_CON_SCL: J2.24 R1.2 R100.1 U1.32
HMD_CON_SDA: J2.25 R2.2 R101.1 U1.33
HP_JD: J6.7 Q2.1 R102.1 R103.2
HP_JD#: Q2.3 R71.2 R84.1 R103.1
HP_OUT_L: R85.1 U11.39
HP_OUT_R: R86.1 U11.40
HPOUT-L_COMBO: C81.1 FB2.2 J6.1
HPOUT-L_R: FB2.1 R85.2
HPOUT-R_COMBO: C80.1 FB3.2 J6.2
HPOUT-R_R: FB3.1 R86.2
HUB_D+1: L7.1 R51.2 U7.20
HUB_D+2: L3.1 R26.2 U7.28
HUB_D+3: R52.1 U7.36
HUB_D-1: L7.3 R49.2 U7.21
HUB_D-2: L3.3 R20.2 U7.29
HUB_D-3: R53.1 U7.37
HUB_RX1_CON_N: J4.5 L5.4 R46.2 U10.1 U10.10
HUB_RX1_CON_P: J4.6 L5.1 R47.2 U10.2 U10.9
HUB_RX2_CON_N: J2.4 L1.1 R7.2 U4.5 U4.6
HUB_RX2_CON_P: J2.5 L1.4 R10.2 U4.4 U4.7
HUB_RXN1: L5.3 R46.1 U7.17
HUB_RXN2: L1.2 R7.1 U7.25
HUB_RXN3: TP9.1 U7.33
HUB_RXP1: L5.2 R47.1 U7.18
HUB_RXP2: L1.3 R10.1 U7.26
HUB_RXP3: TP10.1 U7.34
HUB_TX1_CON_N: J4.8 L6.4 R48.2 U10.4 U10.7
HUB_TX1_CON_P: J4.9 L6.1 R50.2 U10.5 U10.6
HUB_TX2_CON_N: J2.7 L2.1 R11.2 U4.2 U4.9
HUB_TX2_CON_P: J2.8 L2.4 R19.2 U4.1 U4.10
HUB_TXN1: C45.1 U7.14
HUB_TXN2: C16.1 U7.22
HUB_TXN3: TP7.1 U7.30
HUB_TXP1: C46.1 U7.15
HUB_TXP2: C17.1 U7.23
HUB_TXP3: TP8.1 U7.31
I2C_CLT_EN: R16.2 R23.1 U1.8
I2C_CSN: C94.2 R63.1 U11.8
I2C_EN: R67.2 U11.5
I2C_SCL: R66.2 U11.6
I2C_SDA: R65.2 U11.7
ISET: R17.2 R24.1 U1.34
LCD1_AVDD: J1001.27 J1002.27
LCD1_AVSS: J1001.26 J1002.28
LCD1_CLKN_T: J1001.13 J1002.7
LCD1_CLKP_T: J1001.14 J1002.8
LCD1_DATAN0_T: J1001.10 J1002.4
LCD1_DATAN1_T: J1001.16 J1002.10
LCD1_DATAN2_T: J1001.19 J1002.13
LCD1_DATAN3_T: J1001.7 J1002.1
LCD1_DATAP0_T: J1001.11 J1002.5
LCD1_DATAP1_T: J1001.17 J1002.11
LCD1_DATAP2_T: J1001.20 J1002.14
LCD1_DATAP3_T: J1001.8 J1002.2
LCD1_H-SYNC: J1001.29 J1002.25
LCD1_IO_VCC: J1001.28 J1002.26
LCD1_LEDPWM: J1001.25 J1002.29
LCD1_MARK_ID_R: J1001.22 J1002.23
LCD1_TE: J1001.30 J1002.24
LCD1_X_RESET: J1001.24 J1002.30
MIC1_L: C77.2 U11.54
MIC1_MIX: C77.1 C78.1 Q6.D R82.1
MIC1_MIX_FB: FB1.2 R75.1
MIC1_MIX_R: FB1.1 Q5.3 R74.1 R77.1
MIC1_R: C78.2 U11.55
MIC1_VREFOUT_L: R74.2 U11.56
MIC1_VREFOUT_R: TP3.1 U11.59
MIC_JD#: Q1.D R70.2
MIC_MIX: J6.4 R75.2 R76.1 R78.2
NVMCLK: R283.1 U11.11 U13.6
NVMDAT: R282.1 U11.12 U13.5
OVCUR1#: R44.2 U7.64 U8.2
OVCUR2#: R43.2 U7.48 U8.3
P_SPI_CK: U6.6 U7.51
P_SPI_CZ: U6.1 U7.52
P_SPI_DI: U6.2 U7.67
P_SPI_DO: U6.5 U7.66
PGANG: R37.1 U7.60
PIN_14_100: J1001.23
PRE: R15.2 R22.1 U1.16
PSELF: R33.2 U7.68
PWREN1#: R45.2 U7.53 U8.1
PWREN2#: R42.2 U7.47 U8.4
PWREN3#: TP6.1 U7.49
RESET#: C40.1 R35.2 R40.1 U7.69
RST_N: C50.1 R54.1 U11.60
RTERM: R38.1 U7.3
SENSE_A: R69.2 R70.1 R71.1 U11.25
SW: L4.1 U7.1
USB1+: J4.3 L7.2 R51.1 U9.3
USB1-: J4.2 L7.4 R49.1 U9.2
USB2+: J2.2 L3.2 R26.1 U5.3
USB2-: J2.1 L3.4 R20.1 U5.2
USB2.0_D+: J1.3 U7.7
USB2.0_D-: J1.2 U7.6
USB3.0_RXN: J1.5 R28.1
USB3.0_RXN_R: R28.2 U7.11
USB3.0_RXP: J1.6 R27.1
USB3.0_RXP_R: R27.2 U7.12
USB3.0_TXN: C19.2 J1.8
USB3.0_TXN_R: C19.1 U7.8
USB3.0_TXP: C18.2 J1.9
USB3.0_TXP_R: C18.1 U7.9
USB3_TX1_C_N: C45.2 L6.3 R48.1
USB3_TX1_C_P: C46.2 L6.2 R50.1
USB3_TX2_C_N: C16.2 L2.2 R11.1
USB3_TX2_C_P: C17.2 L2.3 R19.1
USB_DET: R61.1 R62.2 U11.64
USB_PWR1: C43.1 C44.1 J4.1 U8.8 U9.4
USB_PWR2: C14.1 C15.1 U5.4 U8.5
USBP1N_R: R53.2 U11.67
USBP1P_R: R52.2 U11.66
VLED_CH1+: J1001.35 J1001.36 J1002.17 J1002.18
VLED_CH1-: J1001.33 J1001.34 J1002.19 J1002.20
VOLT_MON: R73.2 U11.27
VOLUME: R72.2 U11.26
WP: R80.1 R99.2 U13.7
X1: C39.1 R39.1 U7.4 Y1.1
X2: C41.1 R39.2 U7.5 Y1.3
XTALIN: C47.1 U11.62 Y2.2
XTALOUT: C51.1 U11.63 Y2.1
N16700423: R4.1 U1.18
N16708492: R6.2 R8.1 U2.1
N16709232: R5.2 R9.1 U3.1
N16752922: R29.1 U6.7
N16752926: R30.2 U6.3
N16752974: TP5.1 U7.63
N16792985: R59.1 U11.2
N16793019: C73.1 U11.36
N16793115: C73.2 U11.37
N16793150: TP1.1 U11.69
N16793205: C61.2 C62.1 U11.43
N16793213: TP2.1 U11.70
N16793232: R58.1 U11.3
N16793236: C71.1 C72.1 U11.38
N16793242: R56.1 U11.71
N16793251: R60.1 U11.1
N16793299: R57.1 U11.72
N16793611: R55.1 U11.61
N16793759: C74.2 R64.1 U12.3
N16805452: J6.3 R79.1
N16805614: C95.2 Q1.G R82.2
N16805639: Q1.S R84.2
N16817726: C83.1 U14.4
N16817730: C82.1 U14.3
N16817738: C86.1 U14.7
N16817757: C84.1 C88.1 C89.1 L11.1 U14.8
N16817767: C91.2 R87.2 R88.1 U14.2
N16817796: C85.1 R89.2 U14.1
N16817821: C86.2 L10.1 U14.6
N16854855: Q6.S R77.2

Pads without a net: J1 11 24 25; J2 10 23; J6 5; J1001 1 2 3 32; J1002 21; NOREF#2 1; NOREF#3 1; NOREF#4 1; NOREF#5 2; NOREF#6 2; NOREF#10 2; NOREF#11 1; NOREF#13 2; NOREF#14 1; NOREF#15 1; NOREF#16 1; NOREF#17 1; U1 36; U7 38 39 41 42 44 45 50 54 55 62 65 70 73 74 75; U11 10 14 15 16 17 18 20 21 22 23 24 28 29 30 31 32 33 34 44 45 46 47 48 49 50 51 52 53 57 58 74 75 76; U12 4; Y1 2 4

## Via types
v1: diameter 0.66, hole 0.33, TOP to BOTTOM, 124 vias
v2: diameter 0.61, hole 0.305, TOP to BOTTOM, 721 vias

## Routing (per net, layer and track width the routed paths; a pad name or vN(x,y) marks a point on that pad's centre or on a via; arc(x,y) is an arc through that point)
+3.3V_VDDO: length 75.1
  TOP w0.203: U11.9 85.52,67.33 v2(85.79,67.06) ; v2(90.23,67.56) 89.64,67.56 89.52,67.69 U11.19 ; U11.35 91.26,75.04 v2(91.5,74.8) ; U11.65 80.24,73.44 v2(80.07,73.28) ; v2(88.9,78.49) 88.72,78.3 U11.41
  TOP w0.508: R63.2 85.53,61.9 v2(85.53,61.34) ; R60.2 R59.2 R58.2 81.47,64.64 81.6,64.52 ; R102.2 79.82,93.73 79.4,93.31 79.4,89.75 78.68,89.03 78.68,81.53 79.69,80.52 v2(79.69,79.5) 78.68,79.5 78.22,79.04 R54.2
  BOTTOM w0.508: 85.92,62.23 83.71,62.23 R283.2 ; R282.2 83.58,64.06 83.12,64.52 82.23,64.52 81.9,64.19 v2(81.9,63.88)
  BOTTOM w0.533: U13.8 79.77,59.58 C79.1 81.6,58.42
  BOTTOM w0.61: v2(80.07,73.28) C49.1 ; C49.1 81.2,73.34 C48.1 80.96,74.55 79.69,75.82 v2(79.69,79.5) ; C49.1 81.14,72.85 81.6,72.39 83.38,72.39 83.88,71.88 83.88,71.12 83.38,70.61 v1(83.38,69.98) 83.38,68.58 83.88,68.07 84.51,68.07 C55.1 84.71,67.87 C56.1 ; v2(88.9,78.49) 88.71,78.3 C67.1 ; C76.1 v2(91.5,74.8) ; C76.1 90.5,74.61 C75.1 90.5,72.66 90.84,72.31 90.84,68.3 90.41,67.87 ; C76.1 90.69,75.95 ; C67.1 87.76,76.91 C66.1 87.43,77.23 ; C67.1 90.28,76.91 90.69,76.5 90.69,75.95 ; C56.1 85.84,67.82 87.06,67.82 87.3,68.06 C68.1 89.28,68.06 C65.1 ; C56.1 v2(85.79,67.06) ; L9.1 92.64,75.95 90.69,75.95
  vias: v2(81.9,62.36) v2(81.85,60.58) v2(81.85,59.82)
+5V: length 84.8
  TOP w0.508: R87.1 52.58,50.91 C91.1 ; R2.1 v2(60.64,90.81) ; R1.1 v2(61.91,90.81)
  TOP w0.61: C91.1 v2(51.63,49.91)
  BOTTOM w0.254: 41.34,67.82 41.04,68.12 U7.76 ; 41.97,67.82 42.32,67.82 42.32,67.91 42.64,68.23 U7.72
  BOTTOM w0.508: R36.1 v2(52.51,70.49) ; v2(42.35,64.14) 42.86,64.14 43.17,64.44 R35.1 ; R33.1 v2(45.02,65.28) ; R61.2 78.37,71.3 77.79,71.88 77.79,76.84 78.55,77.6 78.55,81.41 79.69,82.55 79.69,84.46 80.45,85.22 84.9,85.22 85.48,84.63 R105.2 86.3,84.12 R104.2
  BOTTOM w0.61: 88.84,57.02 88.46,57.4 73.09,57.4 71.69,58.8 71.69,65.41 74.1,67.82 77.66,67.82 78.93,69.09 v1(78.93,70.36) R61.2
  BOTTOM w0.762: v2(37.2,46.86) 38.54,46.86 39.94,48.26 40.96,48.26 41.21,48.51 48.83,48.51 50.23,49.91 v2(51.63,49.91)
  vias: v2(36.39,47.68) v2(36.39,46.86) v2(36.39,45.97) v2(36.39,45.21) v2(37.2,47.68) v2(37.2,45.97) v2(37.2,45.21) v2(42.35,67.69) v2(42.35,66.93) v2(48.96,90.68) v2(49.72,91.44) v2(54.29,94.62) v2(54.29,93.85) v2(55.05,94.62) v2(55.05,93.85) v2(55.82,94.62) v2(55.82,93.85) v2(56.58,94.62) v2(60.77,79.63) v2(60.77,78.74) v2(61.66,79.63) v2(61.66,78.74) v2(87.95,55.88) v2(88.71,55.88) v2(89.47,55.88) v2(90.23,55.88)
+AVDDH33: length 20
  TOP w0.203: U11.42 88.32,78.5 87.95,78.87
  TOP w0.508: R69.1 v2(94.3,68.96)
  TOP w0.61: 87.95,78.87 87.95,79.24 C63.1 88.85,79.49 89.04,79.3 C64.1 v2(91.76,79.3)
  BOTTOM w0.61: v2(94.3,68.96) 93.56,68.96 92.77,69.75 v1(92.77,72.64) L9.2 93.28,74.03 93.92,74.68 93.92,77.09 v1(93.41,77.6) 91.76,79.25 v2(91.76,79.3)
+V1.5: length 58.5
  TOP w0.178: 66.87,69.6 66.49,69.22 U1.19 ; U1.40 60.37,66.02 60.01,65.66 ; U1.20 66.23,69.62 66.36,69.75 66.36,70.36 ; U1.12 66.36,66.42 66.48,66.29 ; 60.13,69.98 60.13,69.88 60.39,69.62 U1.31
  TOP w0.508: v2(68.06,65.2) C9.1 67.88,65.91 67.5,66.29 66.48,66.29 ; C1.2 59.88,65.53 60.01,65.66 ; 60.13,69.98 60.13,70.23 59.63,70.74 C3.2 ; C6.1 C8.1 67.63,70.61 66.87,69.85 66.87,69.6 ; C6.1 67.63,71.63 66.36,70.36 ; C6.1 v2(68.06,72.42)
  TOP w0.61: C3.2 58.69,72.19 58.23,72.64 55.82,72.64 55.05,71.88 55.05,65.66 56.07,64.64 58.23,64.64 58.69,65.1 C1.2
  TOP w0.762: v2(68.06,72.42) 68.63,72.99 68.63,74.43 67.5,75.56 63.06,75.56 62.67,75.18 56.83,75.18 ; 55.82,72.64 56.07,72.9 56.07,75.69
  BOTTOM w0.61: v2(68.06,65.2) v1(68.06,71.25) v2(68.06,72.42)
+V3.3: length 99
  TOP w0.178: 66.48,65.49 65.95,66.02 U1.11
  TOP w0.198: 59.79,67.22 U1.37
  TOP w0.483: C2.2 58.69,67.23 57.77,68.15 R17.1
  TOP w0.508: R13.1 v2(67.37,73.66) ; 66.48,65.49 67.58,64.39 C7.1 ; R44.1 v2(49.34,80.01) ; R42.1 v2(51.88,80.01) ; 77.53,59.56 77.58,59.61 R64.2 ; R12.1 R15.1 R18.1 R14.1 71.51,65.61 71.06,65.15 69.15,65.15 68.69,64.69 C7.1 ; C7.1 68.69,60.12 67.55,58.98 R16.1 ; 59.79,67.22 59.7,67.31 58.94,67.31 C2.2 ; R45.1 48.07,79.12 v2(49.59,77.6) ; R43.1 v2(50.61,80.01) ; R17.1 57.09,68.33 v2(56.96,68.2)
  TOP w0.61: v2(72.33,68.33) R15.1 ; U12.1 75.17,62.15 C69.2 73.98,61.21 74.61,60.58
  TOP w0.762: 71.06,65.15 71.06,61.59 72.2,60.45 73.6,60.45 ; v2(58.86,56.39) v2(59.75,56.39) 73.34,56.39
  BOTTOM w0.508: v2(67.37,73.66) 68.52,73.66 69.02,73.15 v1(69.02,72.39) 69.02,70.49 69.41,70.1 70.55,70.1 v2(72.33,68.33) ; v2(50.61,80.01) v2(49.34,80.01) ; v2(50.61,80.01) v2(51.88,80.01) ; v2(50.61,80.01) 50.61,78.87 49.59,77.85 v2(49.59,77.6)
  BOTTOM w0.61: v2(56.96,68.2) 55.31,68.2 55.05,68.45
  BOTTOM w0.762: v2(51.88,80.01) 51.88,78.87 53.91,76.84 53.91,73.15 55.05,72.01 55.05,62.87 56.71,61.21 56.71,58.8 v2(58.86,56.39) v2(59.75,56.39)
+V5_USB: length 4.1
  TOP w0.508: TP4.1 58.61,55.5 60.64,55.5 61,55.14 J1.1
AGND: length 27.2
  TOP w0.381: 81.91,101.17 J6.6 83.09,99.79
  TOP w0.457: Q2.2 81.31,91.48 81.09,91.69 v2(80.71,91.69)
  TOP w0.508: C62.2 86.68,80.47 86.68,80.9 ; v2(96.08,97.66) 96.2,97.79 R79.2 ; C64.2 v2(90.23,80.21) ; v2(93.41,88.9) 92.85,88.34 Q5.2 91.3,88.34 90.87,88.77 ; C61.1 v2(85.03,80.21) ; R76.2 v2(80.38,88.01) ; v2(87.31,81.28) 87.55,81.04 C63.2
  IN1 w0.381: 83.09,102.17 J6.6 ; J6.6 82.29,101.17 ; J6.6 83.09,100.17
  IN2 w0.381: 82.29,101.17 J6.6 ; J6.6 83.09,102.17 ; J6.6 83.09,100.17
  BOTTOM w0.381: 81.91,101.17 J6.6 83.09,99.79
  BOTTOM w0.457: Q3.2 87.29,81.3 v2(87.31,81.28) ; Q4.2 87.91,84.44 v2(88.15,84.2)
  BOTTOM w0.508: 84.52,77.22 84.53,77.23 R68.2 86.17,77.48 v2(86.17,78.49) ; R78.1 v2(81.47,98.68) ; v2(80.38,88.01) 80.38,87.2 v1(80.45,87.12) 80.76,86.82 C95.1
  vias: v2(79.69,99.82) v2(79.69,94.74) v2(80.71,97.41) v2(80.71,81.15) v2(81.09,102.11) v2(81.34,77.34) v2(83.88,89.28) v2(85.28,78.49) v2(85.79,81.03) v2(87.44,89.28) v2(90.74,89.28) v2(93.66,87.12) v2(94.55,80.14) v2(94.81,89.28) v2(94.93,99.19) v2(95.06,95.5) v2(95.95,87.12) v2(96.08,94.62) v2(96.08,80.14) v2(96.08,79.12)
AV12: length 9.2
  TOP w0.61: v2(39.56,74.17) 40.5,74.17 C23.1 ; v2(47.18,77.98) 47.18,76.91 C24.1 ; C25.1 v2(43.88,77.98) ; C22.1 48.65,75.06 v2(49.72,75.06)
  BOTTOM w0.254: U7.19 40.15,76.5 v2(39.69,76.96) ; v2(47.18,77.98) 47.04,77.84 U7.35 ; v2(43.88,77.98) 43.84,77.94 U7.27 ; U7.43 49.56,74.9 v2(49.72,75.06) ; v2(39.56,74.17) 39.63,74.1 U7.13
  vias: v1(40.58,75.06)
DGND: length 257.4
  TOP w0.203: v2(119.43,35.21) 119.43,35.58 119.29,35.72 J1002.9 ; J1002.16 121.69,40.6 122.36,41.28 v2(122.62,41.28) ; J1002.12 120.49,36.1 121.08,35.51 v2(121.08,35.21) ; J1002.15 121.69,36.63 122.22,36.1 v2(122.73,36.1) ; v2(117.9,35.34) 117.9,35.53 118.09,35.72 J1002.6 ; v2(116.13,35.21) 116.13,35.47 116.89,36.23 J1002.3 ; J1002.22 119.29,41.28 119.44,41.43 119.44,42.29 v2(118.94,42.8)
  TOP w0.305: J1001.31 118.64,101.3 119.06,101.73 v2(119.19,101.73) ; J1001.12 v2(109.14,101.73) ; v2(104.84,101.73) 104.84,101.65 105.14,101.35 J1001.4 ; J1001.9 v2(107.64,101.73) ; J1001.18 v2(112.14,101.73) ; J1001.21 v2(113.64,101.73) ; v2(106.49,101.73) 106.14,101.38 J1001.6 ; J1001.15 v2(110.64,101.73) ; J1001.5 v2(105.64,101.73)
  TOP w0.381: MT1002.1 118.96,87.65 ; MT1002.1 122.34,84.27 ; MT1002.1 122.34,91.03 ; 123.04,95.77 J1001.M2 124.32,97.25 ; 101.74,95.77 J1001.M1 103.02,97.25 ; MT1001.1 107.34,91.03
  TOP w0.508: J1002.M1 v2(113.98,37.14)
  TOP w0.61: J1002.M2 114.62,40.14 114.36,39.88 v2(114.36,38.61) ; J1001.M2 v2(123.04,98.93) ; J1002.M4 v2(123.41,40.14) ; J1001.M1 v2(101.74,98.93) ; J1002.M3 v2(123.4,37.14)
  IN1 w0.381: 107.34,85.67 MT1001.1 ; MT1001.1 107.34,89.63 ; MT1001.1 105.35,87.65 ; MT1001.1 109.32,87.65 ; 124.32,87.65 MT1002.1 ; MT1002.1 120.35,87.65 ; MT1002.1 122.34,85.67 ; MT1002.1 122.34,89.63
  IN2 w0.381: MT1001.1 107.34,89.63 ; MT1001.1 109.32,87.65 ; MT1001.1 105.35,87.65 ; MT1001.1 107.34,85.67 ; MT1002.1 122.34,89.63 ; MT1002.1 120.35,87.65 ; MT1002.1 124.32,87.65 ; MT1002.1 122.34,85.67
  BOTTOM w0.254: v2(108.27,47.75) v2(108.27,62.99) v2(108.27,77.6) ; v2(111.82,47.75) v2(111.82,62.99) v2(111.82,78.49) ; v2(109.79,47.75) v2(109.79,62.99) v2(109.79,77.6) ; v2(104.71,77.6) v2(104.71,62.99) v2(104.71,47.75) ; v2(106.24,47.75) v2(106.24,62.99) v2(106.24,77.6)
  BOTTOM w0.381: 122.34,84.4 MT1002.1 ; MT1002.1 119.08,87.65 ; MT1002.1 122.34,90.9 ; 110.59,87.65 MT1001.1 ; MT1001.1 104.08,87.65 ; MT1001.1 107.34,84.4 ; MT1001.1 107.34,90.9
  vias: v1(123.63,41.28) v2(101.56,92.71) v2(101.56,86.61) v2(101.92,102.11) v2(102.68,81.28) v2(102.68,78.74) v2(102.68,76.2) v2(102.68,73.66) v2(102.68,71.12) v2(102.68,68.58) v2(102.68,66.04) v2(102.68,63.5) v2(102.68,60.96) v2(102.68,58.42) v2(102.68,56.39) v2(102.68,53.85) v2(102.68,51.31) v2(102.68,48.77) v2(102.68,46.23) v2(102.68,44.2) v2(102.68,41.66) v2(102.68,39.12) v2(102.68,36.58) v2(104.2,98.04) v2(104.71,95) v2(104.71,91.44) v2(104.71,81.28) v2(104.71,79.38) v2(105.22,42.67) v2(105.22,38.86) v2(105.22,34.04) v2(106.49,80.9) v2(107.25,94.49) v2(107.76,39.62) v2(107.76,36.07) v2(108.01,80.9) v2(108.27,34.04) v2(109.28,91.44) v2(109.79,81.03) v2(109.79,79.25) v2(109.79,37.59) v2(111.32,81.03) v2(111.32,79.25) v2(111.82,36.07) v2(112.33,34.04) v2(119.95,91.95) v2(122.62,76.2) v2(122.62,62.99) v2(122.62,47.75) v2(123,102.24) v2(123,43.18) v2(124.02,35.56) v2(124.52,96.52) v2(124.52,91.44) v2(124.52,80.77) v2(124.52,78.23) v2(124.52,75.69) v2(124.52,73.15) v2(124.52,70.61) v2(124.52,68.07) v2(124.52,65.53) v2(124.52,62.99) v2(124.52,60.45) v2(124.52,57.91) v2(124.52,55.37) v2(124.52,52.83) v2(124.52,50.29) v2(124.52,47.75) v2(124.52,45.72) v2(124.52,43.18) v2(124.52,40.64) v2(124.52,38.1)
DV12: length 3.2
  BOTTOM w0.254: v2(46.8,67.82) 47.04,68.06 U7.61 ; U7.46 49.5,73.7 v2(49.72,73.91)
  BOTTOM w0.508: 33.97,62.99 v1(32.58,62.99)
  vias: v2(34.1,65.53) v2(34.99,65.53) v2(35.88,65.53)
GND: length 490.8
  TOP w0.198: U1.35 v2(60.01,68.02) ; U1.15 v2(66.48,67.62)
  TOP w0.356: J2.18 v2(65.94,97.28) ; J2.21 v2(62.94,97.28) ; J2.12 v2(68.94,97.28) ; J2.9 v2(70.44,97.28) ; J2.3 v2(73.44,94.62) ; v2(71.94,94.62) J2.6 ; J2.15 v2(67.44,97.28) ; J2.26 v2(60.44,97.28)
  TOP w0.381: J3.3 44.96,40.19 44.13,41.02 43.88,41.02 ; J3.3 43.54,39.92 ; J3.3 44.96,39.31 44.26,38.61 44.26,38.35 44.96,37.65 J3.G3 ; 43.75,43.18 44.51,43.18 44.96,42.73 J3.2 ; 93.42,51.05 J1.G2 ; J1.G2 94.83,49.64 ; J1.G2 94.83,52.46 ; J1.G2 96.24,51.05 ; 56.18,49.64 J1.G1 ; J1.G1 56.18,52.46 ; J1.G1 54.77,51.05 ; J1.G1 57.59,51.05 ; 47.31,90.93 46.56,90.19 46.02,90.19 45.69,90.52 J4.G1 ; 43.88,41.02 43.75,40.89 ; 43.88,41.02 44.96,42.11 J3.2 ; 45.91,93.09 46.04,92.96 46.04,91.82 45.69,91.47 J4.G1 ; 52.64,95.85 J2.G2 ; J2.G2 52.64,102.08 ; J2.G2 51,98.97 ; J2.G2 54.28,98.97 ; J2.G1 75.6,98.97 ; J2.G1 77.24,95.85 ; J2.G1 77.24,102.08 ; J3.2 43.72,42.37 ; 53.15,41.4 51.81,40.07 J3.4 ; J3.G3 43.64,36.97 ; J3.G3 44.96,35.11 ; 28.55,90.97 J4.G2 29.99,88.95 ; 51.81,35.12 J3.G2 ; J3.G2 51.81,37.53 52.64,38.35 51.81,39.18 J3.4 ; J3.G2 53.26,36.97 ; J4.G1 46.36,90.97 46.96,91.57 47.18,91.57 ; J3.4 53.36,39.92 ; 45.69,96.3 45.69,98.24 ; 45.69,96.3 45.69,94.36 ; 45.69,96.3 46.93,96.3 ; 75.29,83.4 H1.1 72.4,80.52 ; J3.G1 51.81,42.23 53.15,40.89
  TOP w0.406: U10.3 v2(36.39,86.11) ; U4.8 71.94,93.66 v2(71.94,94.62) ; U10.8 v2(36.39,88.65) ; U4.3 v2(71.95,91.95)
  TOP w0.508: v2(74.41,66.93) C70.1 ; C70.1 v2(73.6,66.04) ; C70.1 v2(74.41,65.28) ; v2(73.22,69.85) 73.1,69.85 R4.2 71.82,71.13 v2(71.82,71.5) ; v2(69.79,70.87) 69.53,70.61 C8.2 ; v2(36.39,79.88) C38.1 v2(35.18,78.68) ; v2(38.29,79.88) 38.54,79.63 C37.1 ; v2(54.42,54.86) 54.05,54.86 C83.2 ; v2(43.62,85.09) 43.62,85.52 C44.2 ; C60.2 R67.1 v2(84.14,64.52) ; v2(62.04,100.54) J2.S2 ; J2.S2 v2(58.61,100.54) ; J2.S2 v2(60.32,99.19) ; J1.22 82,55.22 v2(81.85,55.37) ; v2(56.32,90.81) 56.32,92.38 C93.2 56.78,92.63 57.09,92.33 v2(57.09,90.81) ; C25.2 v2(43.12,75.87) ; C92.2 v2(50.61,46.1) ; C92.2 v2(49.8,46.91) ; C92.2 v2(49.8,45.21) ; v2(39.81,78.05) C26.2 ; R22.2 v2(69.79,68.33) ; v2(78.04,91.69) 77.19,91.69 U5.1 76.9,91.19 77.28,90.81 v2(78.04,90.81) ; v2(94.3,73.79) 94.3,74.55 94.06,74.79 C71.2 ; v2(41.72,84.2) U9.1 42.65,85.31 v2(42.86,85.09) ; C1.1 v2(56.96,65.53) ; R25.2 v2(69.79,67.31) ; J1.4 64,52.76 v2(63.94,52.7) ; C51.2 v2(76.9,72.95) ; C5.2 v2(59.63,90.81) ; v2(85.92,64.52) 85.79,64.64 C94.1 ; v2(67.88,100.54) J2.S1 ; J2.S1 v2(71.31,100.54) ; J2.S1 v2(69.57,99.19) ; C72.2 v2(91.63,77.42) ; C7.2 v2(69.61,63.63) ; R88.2 v2(53.91,50.42) ; v2(56.96,69.47) 57.65,69.47 R24.2 ; R73.1 v2(94.3,73.03) ; C57.2 v2(89.98,65.01) ; R66.1 R65.1 84.7,61.26 v2(84.77,61.34) ; J1.19 v2(79,55.37) ; C2.1 v2(56.96,67.06) ; 73.27,63.07 C69.1 73.98,63.88 ; C9.2 v2(69.79,65.91) ; C88.2 42.05,43.23 v2(42.23,43.05) ; 65.34,58.98 R23.2 ; v2(70.42,55.5) 70,55.08 J1.10 ; R38.2 v1(39.56,71.63) v2(39.56,72.9) ; R21.2 v2(69.79,69.34) ; R72.1 v2(94.3,72.01) ; C29.2 v2(43.12,70.23) ; v2(86.42,63.75) 86.42,63.37 86.86,62.94 R8.2 87.52,62.94 87.95,63.37 v2(87.95,63.75) ; C24.2 v2(46.29,75.87) ; v2(76.64,68.71) 77.33,68.71 R56.2 ; 45.53,84.46 45.28,84.2 v2(43.62,84.2) ; C20.2 v2(46.09,70.23) ; R55.2 v2(78.55,76.15) ; v2(46.67,74.93) C22.2 ; C36.1 v2(44.39,73.28) ; C50.2 v2(76.9,77.47) ; J1.16 v2(76,55.36) ; v2(50.69,91.44) C42.2 50.69,90.04 50.61,89.97 U8.6 50.61,87.38 50.23,87 v2(49.09,87) ; C58.2 v2(87.95,64.52) ; R57.2 77.2,67.06 v2(76.64,67.06) ; J1.13 v2(73,55.41) ; C47.2 v2(76.9,75.77) ; C6.2 v2(69.79,71.63) ; C23.2 v2(42.35,74.04) ; C3.1 v2(57.77,71.5) ; C82.2 v2(54.42,53.98) ; J1.7 v2(67,52.7) ; C21.2 49.52,72.01 v2(50.1,72.01)
  TOP w0.61: J1.S1 v2(60,52.7) ; J1.28 v2(88,52.83) ; v2(90.87,52.83) 91,52.97 J1.S2 ; C74.1 v2(78.8,64.9) ; v2(76.14,61.21) 76.14,61.59 76.26,61.72 U12.2
  IN1 w0.381: 44.96,38.55 J3.3 ; J3.3 44.96,40.44 44.39,41.02 ; J3.3 44.05,39.92 ; J3.G1 50.95,42.37 ; J3.G1 52.68,42.37 ; J3.G1 51.81,43.73 ; J4.G3 46.55,96.22 ; J4.G3 45.69,97.78 ; J4.G3 45.69,94.66 ; 52.64,101.7 J2.G2 ; J2.G2 53.9,98.97 ; J2.G2 51.39,98.97 ; J2.G2 52.64,96.23 ; J4.G1 45.69,89.41 ; J4.G1 46.55,90.97 ; J4.G1 44.82,90.97 ; 75.29,83.4 H1.1 ; H1.1 75.29,77.64 ; H1.1 78.17,80.52 ; H1.1 72.4,80.52 ; J3.2 44.1,42.37 ; J3.2 45.83,42.37 ; J3.2 44.96,43.73 ; J4.G4 29.12,96.22 ; J4.G4 29.99,94.66 ; J4.G4 29.99,97.78 ; 30.85,90.97 J4.G2 ; J4.G2 29.99,89.41 ; J4.G2 29.12,90.97 ; J4.7 37.84,89.06 ; J4.7 37.02,89.87 ; J4.7 37.84,90.68 ; J4.7 38.65,89.87 ; J3.G3 44.96,35.62 ; J3.G3 44.96,38.29 ; J3.G3 43.89,36.97 ; 33.52,91.37 J4.4 35.15,91.37 ; J3.G2 52.76,36.97 ; J3.G2 J3.4 ; J3.G2 51.81,35.37 ; J3.4 52.81,39.92 ; J3.4 51.81,40.57 52.26,41.02 ; J2.G1 77.24,101.7 ; J2.G1 77.24,96.23 ; J2.G1 75.99,98.97 ; J2.G1 78.5,98.97
  IN2 w0.381: 52.76,36.97 J3.G2 ; J3.G2 51.81,35.49 ; J3.G2 51.81,38.29 ; 45.83,42.37 J3.2 ; J3.2 44.96,43.73 ; J3.2 44.1,42.37 ; J4.G3 45.69,97.78 ; J4.G3 46.55,96.22 ; J4.G3 45.69,94.66 ; 52.68,42.37 J3.G1 ; J3.G1 50.95,42.37 ; J3.G1 51.81,43.73 ; J3.G3 44.02,36.97 ; J3.G3 44.96,38.17 ; J3.G3 44.96,35.63 ; 30.85,90.97 J4.G2 ; J4.G2 29.99,89.41 ; J4.G2 29.12,90.97 ; H2.1 33.37,52.62 ; H2.1 30.49,49.74 ; H2.1 30.49,55.5 ; 77.24,96.23 J2.G1 ; J2.G1 75.99,98.97 ; J2.G1 77.24,101.7 ; J2.G1 78.5,98.97 ; J4.G1 45.69,89.41 ; J4.G1 46.55,90.97 ; J4.G1 44.82,90.97 ; 72.4,80.52 H1.1 ; H1.1 78.17,80.52 ; H1.1 75.29,77.64 ; H1.1 75.29,83.4 ; J3.3 43.84,39.92 ; J3.3 44.96,40.44 44.39,41.02 ; J3.3 44.96,38.41 ; 52.64,101.7 J2.G2 ; J2.G2 51.39,98.97 ; J2.G2 52.64,96.23 ; J2.G2 53.9,98.97 ; 29.99,94.66 J4.G4 ; J4.G4 29.12,96.22 ; J4.G4 29.99,97.78 ; J4.7 37.84,90.68 ; J4.7 37.02,89.87 ; J4.7 38.65,89.87 ; J4.7 37.84,89.06 ; 35.15,91.37 J4.4 33.52,91.37 ; J3.4 52.73,39.92 ; J3.4 51.81,40.45 52.39,41.02 ; J3.4 51.81,38.54
  BOTTOM w0.254: U7.40 49.62,76.1 v2(49.72,76.2) ; U7.24 42.64,77.96 v2(42.62,77.98) ; U7.10 v2(39.56,72.9) ; U7.32 v2(45.84,77.98) ; v2(39.43,75.56) 39.56,75.56 39.83,75.3 U7.16
  BOTTOM w0.381: 52.64,102.08 J2.G2 ; J2.G2 52.64,95.85 ; J2.G2 51,98.97 ; J2.G2 54.28,98.97 ; J4.G3 45.69,98.39 ; J4.G3 45.69,94.01 v2(45.66,93.98) ; J4.G3 47.26,96.22 ; J3.2 44.96,42.11 44.01,41.15 44.96,40.19 J3.3 ; J3.2 44.96,42.98 44.77,43.18 43.24,43.18 ; J3.2 43.72,42.37 ; J4.G4 29.99,94.19 ; J4.G4 28.47,96.22 ; J4.G4 30.04,96.27 v2(30.04,98.81) ; 28.89,92.46 29.99,91.36 J4.G2 ; J3.G1 53.06,42.37 ; J3.G1 50.57,42.37 ; J3.G1 51.81,42.23 53.15,40.89 ; J3.G1 51.81,44.11 ; 75.29,77.64 H1.1 ; H1.1 75.29,83.4 ; H1.1 72.4,80.52 ; H2.1 33.37,52.62 ; H2.1 30.49,55.5 ; H2.1 30.49,49.74 ; 77.24,102.08 J2.G1 ; J2.G1 75.6,98.97 ; J2.G1 77.24,95.85 ; J4.4 33.14,91.37 32.96,91.19 ; J3.3 43.54,39.92 ; J3.3 44.96,39.31 44.01,38.35 ; J4.G2 28.55,90.97 ; J4.G2 29.99,89.08 ; J3.4 51.81,39.18 52.64,38.35 51.81,37.53 J3.G2 ; J3.4 51.81,40.07 53.15,41.4 ; J3.4 53.36,39.92 ; J3.G3 44.96,35.25 ; J3.G3 44.96,37.65 44.26,38.35 ; J3.G3 43.75,36.96 ; J4.G1 47.02,90.97 ; J4.G1 45.69,88.87 ; J4.G1 45.69,91.34 46.8,92.46 ; J3.G2 53.29,36.97 ; J3.G2 51.81,35.05 ; J4.7 37.84,88.59 ; 95.06,77.34 93.66,78.74 93.66,80.14 91.63,82.17 91.63,85.09 92.39,85.85 C81.2
  BOTTOM w0.508: v2(48.83,65.15) 48.83,65.71 C30.2 ; C28.1 52.32,66.48 v2(51.5,65.66) ; v2(32.7,60.83) 34.2,60.83 EC1.2 ; v2(48.07,65.15) 47.56,65.66 R37.2 ; C4.2 88,53.72 v2(88,52.83) ; 78.6,88.7 81.03,88.7 81.39,88.34 C80.2 ; v2(42.35,65.66) 42.48,65.66 42.74,65.91 C40.2 R40.2 ; v2(32.7,61.85) 34,61.85 EC1.2 ; v2(42.35,64.9) 41.83,64.9 C27.2 ; 78.42,59.56 78.85,59.13 C79.2 77.91,58.42 ; R34.2 38.67,65.66 v2(38.54,65.53) 38.04,65.53 37.8,65.77 C34.2 ; EC1.2 35.09,61.24 35.88,60.45 v2(36.51,60.45) ; C32.2 v2(54.42,60.2) ; v2(78.55,76.15) 78.55,75.13 R62.1 ; R41.2 v2(52.51,69.47) ; C59.2 v2(82.99,71.63) ; C31.2 v2(52.51,68.45) ; C39.2 v2(35.37,69.39) ; R99.1 84.06,60.5 84.77,61.21 v2(84.77,61.34) ; v2(35.37,72.01) 35.45,72.09 C41.2
  BOTTOM w0.533: 75.88,59.82 U13.1 73.22,59.82 ; 75.88,63.63 U13.4 v2(72.96,63.63) ; 75.88,62.36 73.34,62.36 ; 73.22,61.09 U13.2 76.01,61.09 v2(76.14,61.21)
  BOTTOM w0.61: v2(32.58,66.8) 33.29,66.8 C33.1 33.67,67.36 33.34,67.69 v2(32.58,67.69) ; v2(47.05,63.37) 46.55,63.88 U6.4
  vias: v1(44.01,74.04) v2(27.8,47.12) v2(27.8,43.99) v2(27.88,98.81) v2(27.88,92.84) v2(27.88,87.76) v2(27.88,80.14) v2(27.88,77.6) v2(27.88,72.52) v2(27.88,67.44) v2(27.88,62.36) v2(27.88,57.28) v2(27.88,50.42) v2(30.92,37.47) v2(31.05,33.91) v2(31.31,49.02) v2(31.31,48.01) v2(31.31,47.24) v2(31.31,46.48) v2(31.31,45.59) v2(31.31,44.83) v2(31.31,44.07) v2(31.43,78.11) v2(32.09,85.09) v2(32.07,75.44) v2(32.32,39.5) v2(32.58,41.66) v2(32.96,56.9) v2(33.59,48.01) v2(33.59,47.24) v2(33.59,46.48) v2(33.59,45.59) v2(33.59,44.83) v2(33.59,44.07) v2(33.85,79.88) v2(33.97,83.06) v2(34.1,75.44) v2(34.61,33.91) v2(36.14,36.68) v2(39.69,33.91) v2(41.21,78.99) v2(41.97,75.69) v2(41.97,73.15) v2(42.1,82.42) v2(42.74,41.15) v2(42.74,36.58) v2(42.86,83.31) v2(43.24,74.68) v2(43.24,73.15) v2(44.51,70.23) v2(44.77,33.91) v2(45.02,75.69) v2(45.02,74.68) v2(45.02,55.5) v2(45.4,51.44) v2(45.53,54.61) v2(45.53,53.47) v2(45.53,52.32) v2(45.66,102.11) v2(45.66,99.69) v2(46.04,55.5) v2(46.16,51.44) v2(46.8,50.67) v2(46.93,55.5) v2(46.93,54.61) v2(46.93,53.47) v2(46.93,52.32) v2(46.93,51.44) v2(47.18,49.91) v2(47.56,50.67) v2(47.94,102.11) v2(48.07,49.91) v2(48.32,50.67) v2(48.83,98.17) v2(48.96,93.85) v2(51.12,48.77) v2(51.63,47.24) v2(51.63,45.21) v2(52.26,33.91) v2(52.9,46.23) v2(53.02,94.87) v2(54.8,102.11) v2(54.8,98.04) v2(55.05,86.61) v2(55.05,76.07) v2(55.05,75.31) v2(55.05,74.55) v2(55.05,73.79) v2(55.05,43.56) v2(55.05,41.28) v2(55.05,38.86) v2(55.05,36.07) v2(55.05,33.91) v2(55.94,70.74) v2(56.32,86.74) v2(57.72,98.04) v2(57.72,97.28) v2(57.72,94.62) v2(57.72,86.74) v2(58.1,102.11) v2(58.36,43.94) v2(58.48,94.62) v2(58.61,98.04) v2(58.61,97.28) v2(59.75,72.01) v2(59.75,59.94) v2(60.52,76.45) v2(61.15,76.96) v2(61.28,52.7) v2(61.4,84.2) v2(61.4,83.31) v2(61.66,73.79) v2(61.91,69.22) v2(61.91,67.69) v2(61.91,66.42) v2(61.91,43.94) v2(62.17,94.11) v2(62.29,84.2) v2(62.29,83.31) v2(62.8,50.93) v2(62.8,49.66) v2(63.18,102.11) v2(63.31,73.79) v2(63.31,72.26) v2(63.37,69.22) v2(63.37,67.69) v2(63.37,66.42) v2(63.56,59.94) v2(63.82,48.77) v2(64.2,77.72) v2(64.33,94.11) v2(64.71,83.95) v2(64.71,81.92) v2(64.71,80.26) v2(64.77,69.22) v2(64.77,67.69) v2(64.77,66.42) v2(65.34,59.94) v2(65.34,43.94) v2(65.6,82.42) v2(65.98,94.11) v2(66.92,71.93) v2(67.75,60.83) v2(68.26,102.11) v2(68.26,94.11) v2(68.39,48.77) v2(68.39,43.94) v2(69.53,59.18) v2(69.66,94.11) v2(70.8,86.36) v2(71.18,43.94) v2(71.82,50.29) v2(72.45,83.95) v2(72.45,78.36) v2(72.58,59.44) v2(72.71,75.31) v2(72.71,73.79) v2(72.96,64.9) v2(72.96,62.1) v2(73.09,48.77) v2(73.34,102.11) v2(74.1,50.29) v2(74.1,43.94) v2(74.49,86.74) v2(74.61,99.19) v2(74.74,51.56) v2(74.99,70.74) v2(75.12,84.07) v2(75.37,88.44) v2(75.37,87.5) v2(75.63,86.36) v2(76.9,61.21) v2(77.15,43.94) v2(77.66,51.69) v2(77.79,82.93) v2(77.91,86.36) v2(78.04,64.9) v2(78.17,89.66) v2(78.42,102.11) v2(78.42,96.01) v2(78.42,93.09) v2(79.18,48.77) v2(79.64,64.52) v2(80.2,51.69) v2(80.2,43.94) v2(80.4,64.52) v2(80.71,52.7) v2(82.74,75.82) v2(83.25,52.7) v2(83.25,43.94) v2(83.5,48.77) v2(83.76,74.42) v2(83.76,73.15) v2(84.39,56.64) v2(84.39,55.88) v2(84.77,75.82) v2(85.28,56.64) v2(85.28,55.88) v2(85.41,74.42) v2(85.41,72.9) v2(85.41,71.25) v2(86.3,43.94) v2(86.42,69.6) v2(86.55,48.77) v2(87.19,74.42) v2(87.19,72.9) v2(87.19,71.25) v2(88.84,74.42) v2(88.84,72.52) v2(88.84,71.12) v2(88.84,51.05) v2(89.34,43.94) v2(92.39,43.94) v2(96.08,77.98) v2(96.08,72.9) v2(96.08,67.82) v2(96.08,62.74) v2(96.08,55.63) v2(96.08,52.58) v2(96.08,47.5)
